# Allegro board 141939-HS-LED-CTRL-REV_A_PCB.brd
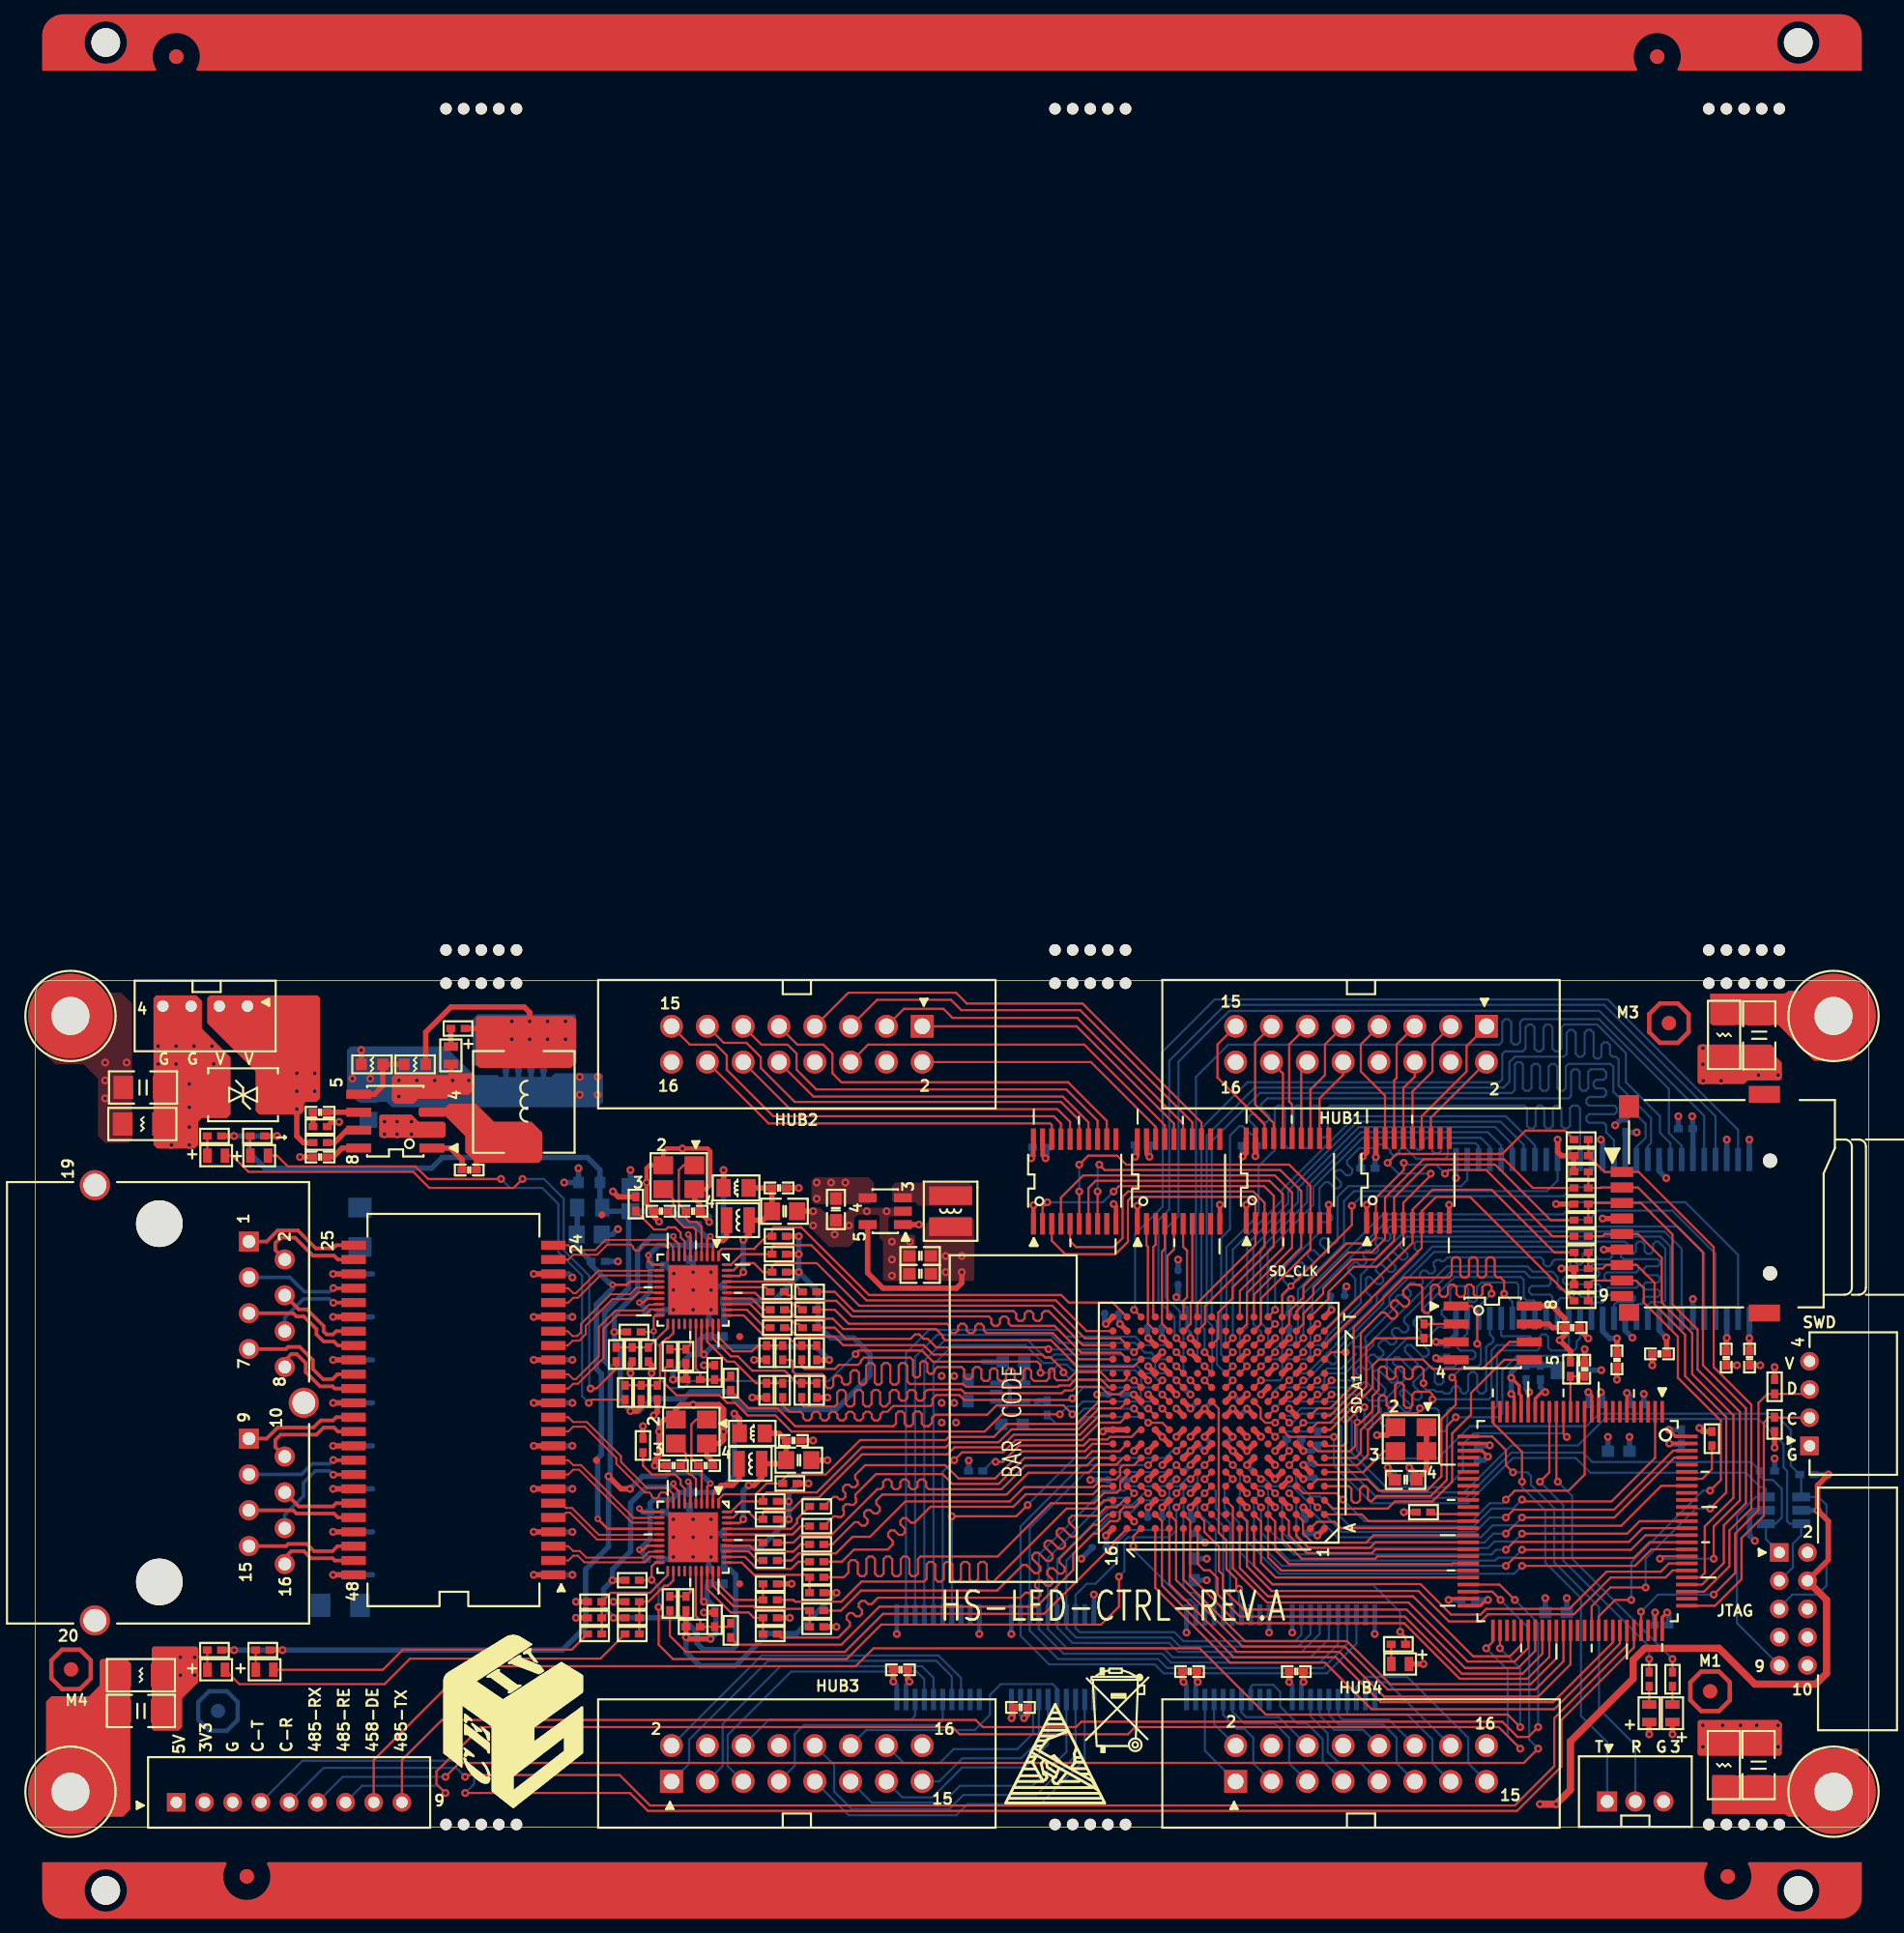
[diagram p0: board, top side]
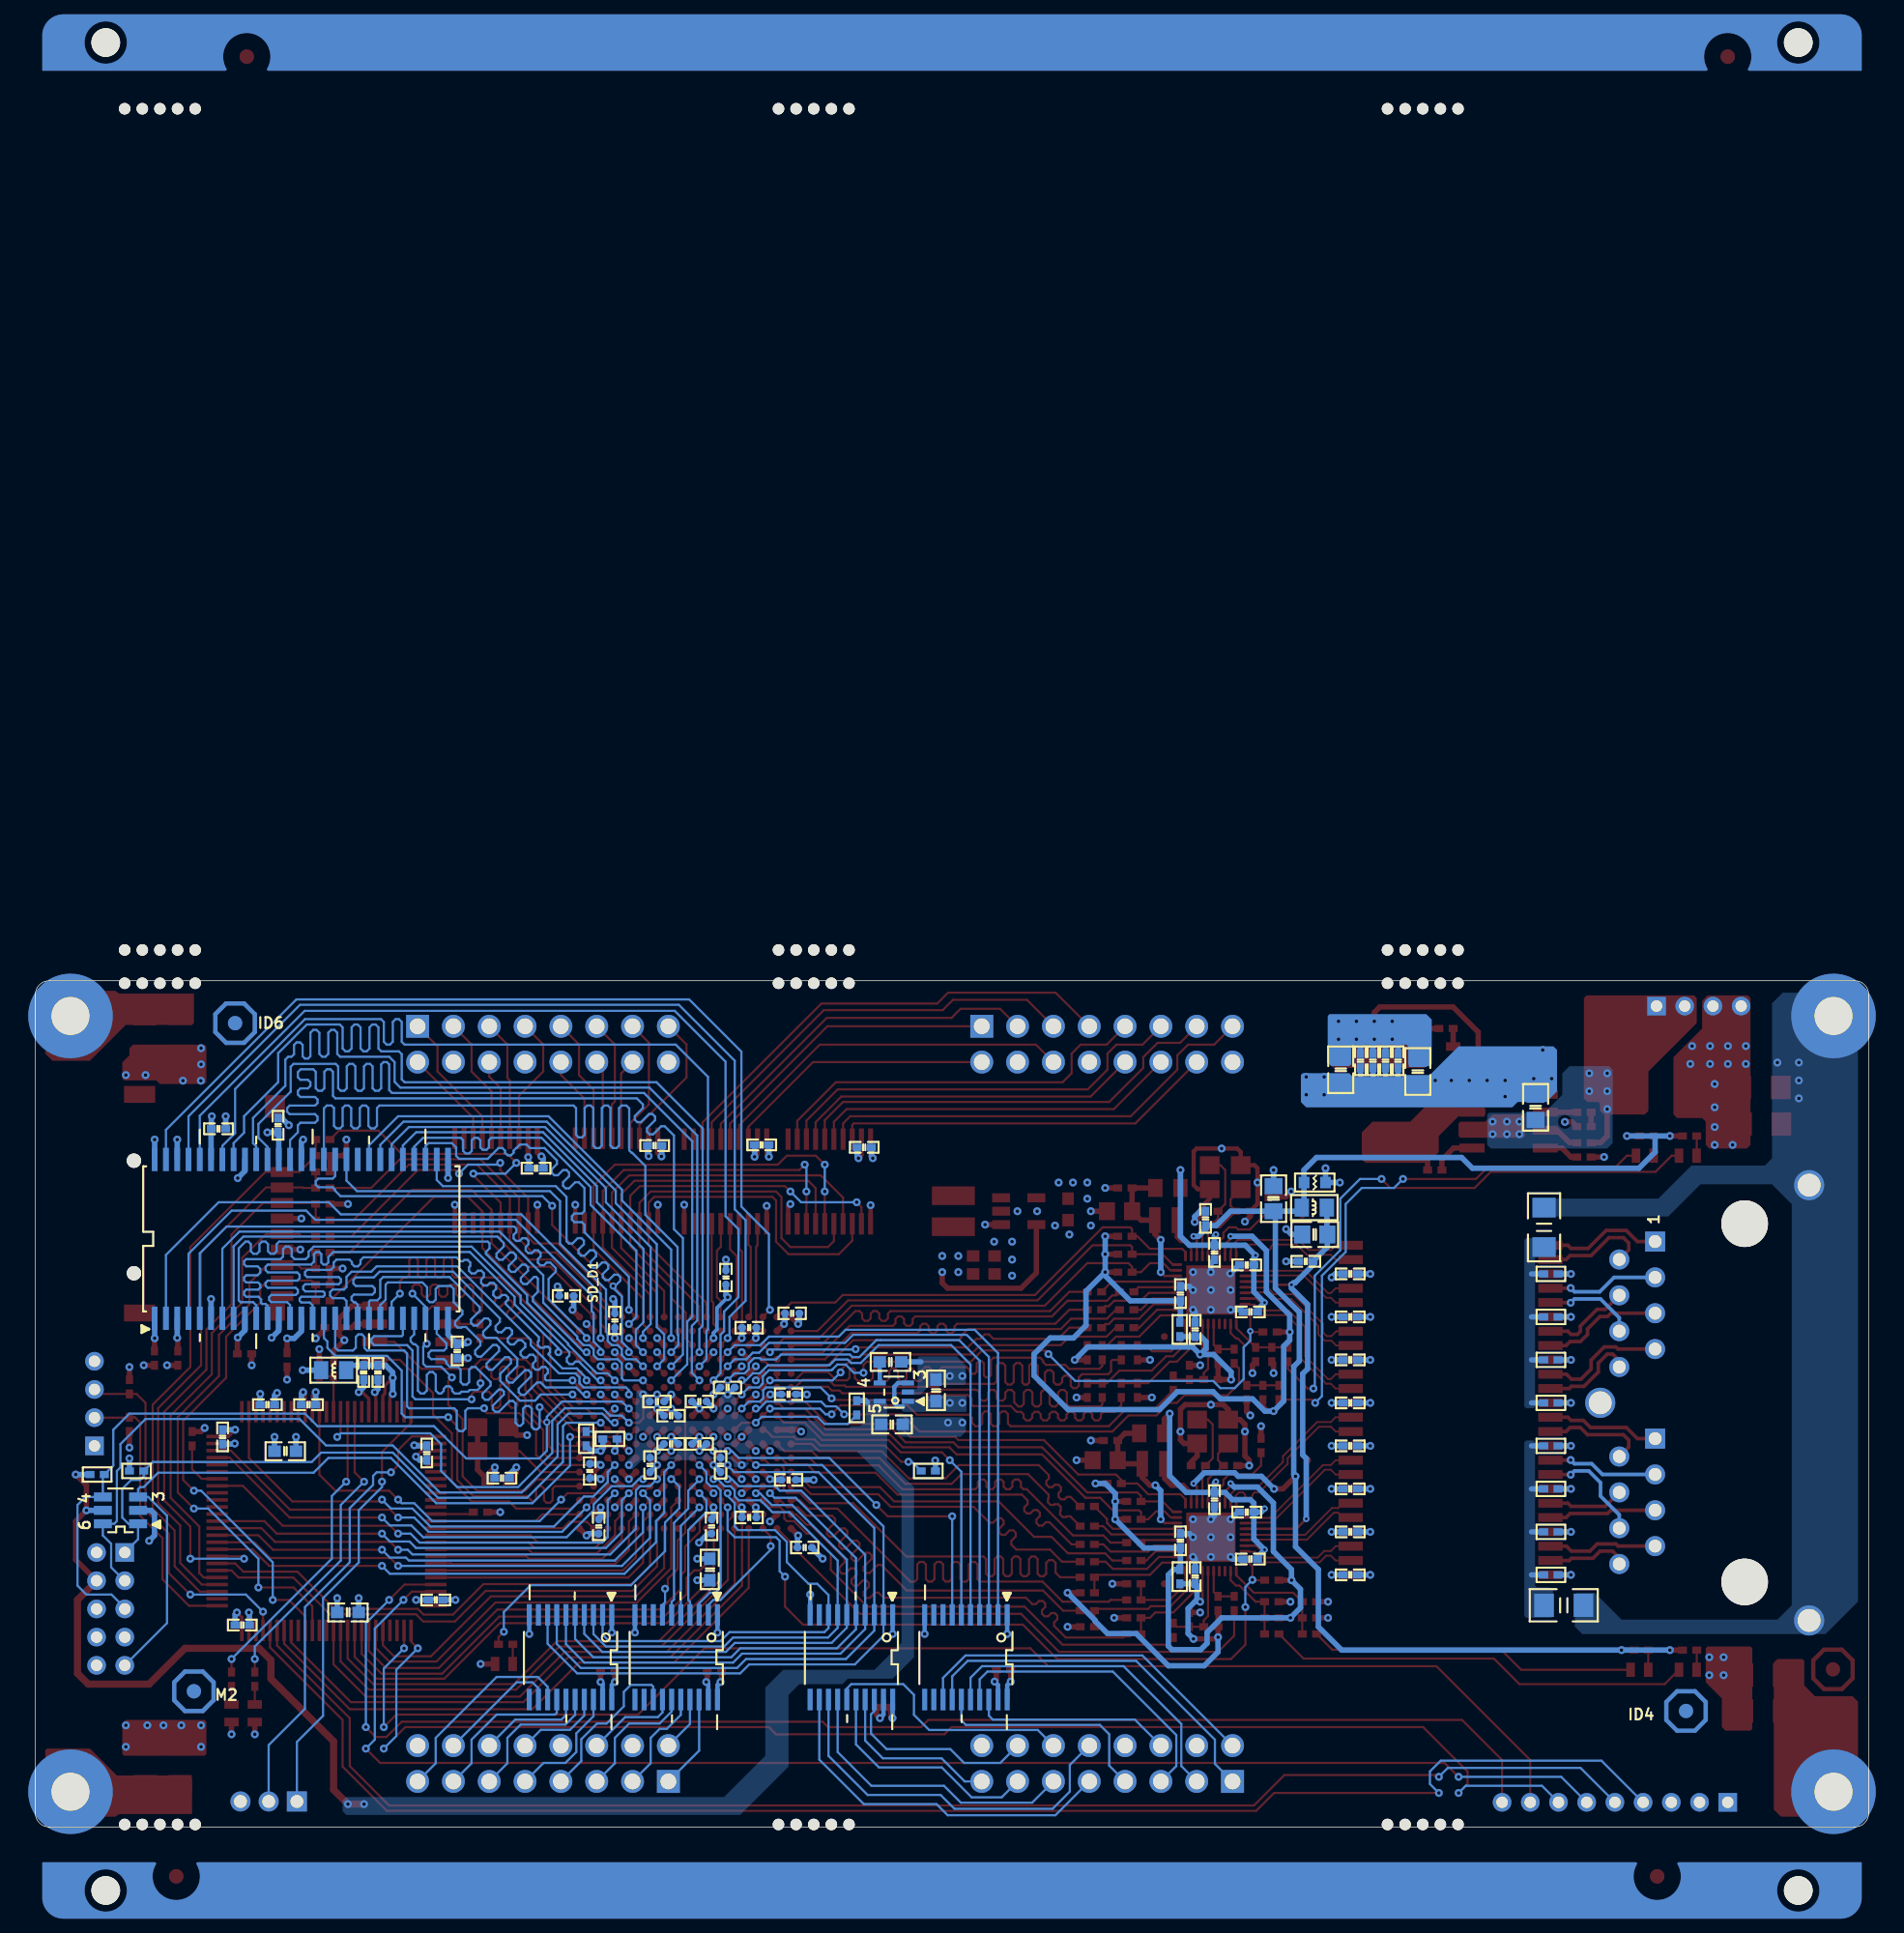
[diagram p1: board, bottom side, seen from below]

Outline 130 x 60 mm; copper layers: TOP, ART02, ART03, BOTTOM. Coordinates in mm from the lower left corner of the outline.
Outline path: 0,59 arc(0.29,59.71) 1,60 129,60 arc(129.71,59.71) 130,59 130,1 arc(129.71,0.29) 129,0 1,0 arc(0.29,0.29) 0,1 0,59

## Design rules (mm)
net group DIFFPAIR0: nets ENETA_MDI_N0 ENETA_MDI_P0
net group DIFFPAIR1: nets ENETA_MDI_N1 ENETA_MDI_P1
net group DIFFPAIR2: nets ENETA_MDI_N2 ENETA_MDI_P2
net group DIFFPAIR3: nets ENETA_MDI_N3 ENETA_MDI_P3
net group DIFFPAIR4: nets ENETB_MDI_N0 ENETB_MDI_P0
net group DIFFPAIR5: nets ENETB_MDI_N1 ENETB_MDI_P1
net group DIFFPAIR6: nets ENETB_MDI_N2 ENETB_MDI_P2
net group DIFFPAIR7: nets ENETB_MDI_N3 ENETB_MDI_P3
net group ENETA_GTX_CLK: nets ENETA_GTX_CLK MIIA_GTX_CLK
net group ENETA_RX_D0: nets ENETA_RX_D0 MIIA_RX_D0
net group ENETA_RX_D1: nets ENETA_RX_D1 MIIA_RX_D1
net group ENETA_RX_DV: nets ENETA_RX_DV MIIA_RX_DV
net group ENETA_TX_D0: nets ENETA_TX_D0 MIIA_TX_D0
net group ENETA_TX_D1: nets ENETA_TX_D1 MIIA_TX_D1
net group ENETA_TX_D2: nets ENETA_TX_D2 MIIA_TX_D2
net group ENETA_TX_D3: nets ENETA_TX_D3 MIIA_TX_D3
net group ENETA_TX_EN: nets ENETA_TX_EN MIIA_TX_EN
net group ENETB_GTX_CLK: nets ENETB_GTX_CLK MIIB_GTX_CLK
net group ENETB_RX_D0: nets ENETB_RX_D0 MIIB_RX_D0
net group ENETB_RX_D1: nets ENETB_RX_D1 MIIB_RX_D1
net group ENETB_RX_DV: nets ENETB_RX_DV MIIB_RX_DV
net group ENETB_TX_D0: nets ENETB_TX_D0 MIIB_TX_D0
net group ENETB_TX_D1: nets ENETB_TX_D1 MIIB_TX_D1
net group ENETB_TX_D2: nets ENETB_TX_D2 MIIB_TX_D2
net group ENETB_TX_D3: nets ENETB_TX_D3 MIIB_TX_D3
net group ENETB_TX_EN: nets ENETB_TX_EN MIIB_TX_EN
net group ENETA_RX_CLK: nets ENETA_RX_CLK ENETA_RX_D2 ENETA_RX_D3 MIIA_RX_CLK MIIA_RX_D2 MIIA_RX_D3 VDDIO_A_RGMII
net group ENETB_RX_CLK: nets ENETB_RX_CLK ENETB_RX_D2 ENETB_RX_D3 MIIB_RX_CLK MIIB_RX_D2 MIIB_RX_D3 VDDIO_B_RGMII
net group POWER: nets ENET_AVDD_3.3 ENET_DVDD_3.3 ENETA_AVDD_1.1 ENETA_DVDD_1.1 ENETA_DVDD_2.5 ENETB_AVDD_1.1 ENETB_DVDD_1.1 ENETB_DVDD_2.5

## Placement (name value [footprint] x y rotation side)
C1  10u  [C0805]  23.63 51.02 90 bottom
C2  0.1u  [C0402]  20.2 47.5 180 top
C3  33n  [C0402]  20.2 50.68 180 top
C4  0.01u  [C0402]  30.77 46.58 180 top
C5  10u  [C0805]  37.44 53.69 270 bottom
C6  10u  [C0805]  31.98 53.56 270 bottom
C7  0.1u  [C0402]  35.15 54.33 270 bottom
C8  0.1u  [C0402]  36.04 54.33 270 bottom
C9  0.1u  [C0402]  34.26 54.33 270 bottom
C10  0.1u  [C0402]  33.37 54.33 270 bottom
C11  10uF  [C0402]  109.86 32.46 270 top
C28  104  [C0402]  108.97 35.4 180 top
C29  104  [C0402]  112.15 33.12 270 top
C30  104  [C0402]  115.16 33.54 180 top
C31  104  [C0402]  100.08 33.75 270 bottom
C32  104  [C0402]  119.89 33.24 270 top
C33  104  [C0402]  112.78 49.75 90 bottom
C34  104  [C0402]  121.54 33.24 270 top
C35  104  [C0402]  117 49.5 180 bottom
C36  22u/6.3V  [C0603]  112.27 26.64 0 bottom
C37  22u/6.3V  [C0603]  107.83 15.21 0 bottom
C38  22u/6.3V  [C0603]  82.17 18.26 90 bottom
C39  27pF  [C0402]  46.65 43.66 180 top
C40  27pF  [C0402]  47.53 25.62 180 top
C41  27pF  [C0402]  44.36 43.66 0 top
C42  27pF  [C0402]  45.25 25.62 0 top
C43  1uF  [C0402]  48.8 37.82 90 bottom
C44  0.1uF  [C0402]  47.76 35.28 90 bottom
C45  1uF  [C0402]  48.8 20.29 90 bottom
C46  0.1uF  [C0402]  47.76 17.75 90 bottom
C47  0.1uF  [C0402]  46.39 40.74 270 bottom
C48  0.1uF  [C0402]  44.11 39.85 0 bottom
C49  10uF  [C0805]  53.12 43.66 0 top
C50  0.1uF  [C0402]  52.74 45.31 0 top
C51  0.1uF  [C0402]  43.85 36.52 0 bottom
C52  10uF  [C0805]  54.14 26 0 top
C53  0.1uF  [C0402]  53.76 27.4 0 top
C54  0.1uF  [C0402]  46.39 23.21 270 bottom
C55  0.1uF  [C0402]  43.85 18.99 0 bottom
C56  0.1uF  [C0402]  44.11 22.32 0 bottom
C57  0.1uF  [C0402]  47.03 43.15 90 bottom
C58  10uF  [C0805]  42.2 44.55 90 bottom
C59  0.1uF  [C0402]  39.91 40.1 0 bottom
C60  1uF  [C0805]  39.28 42.01 0 bottom
C226  0.1uF  [C0402]  36.76 17.88 180 bottom
C227  0.1uF  [C0402]  36.76 20.92 180 bottom
C228  0.1uF  [C0402]  36.76 23.97 180 bottom
C229  0.1uF  [C0402]  36.76 27.02 180 bottom
C230  0.1uF  [C0402]  36.76 30.07 180 bottom
C231  0.1uF  [C0402]  36.76 33.12 180 bottom
C232  0.1uF  [C0402]  36.76 36.16 180 bottom
C233  0.1uF  [C0402]  36.76 39.21 180 bottom
C236  1000pF/2KV  [C1206]  23.02 42.51 270 bottom
C238  22u/6.3V  [C0603]  56.77 43.78 270 top
C239  22u/6.3V  [C0603]  62.74 40.48 180 top
C240  22u/6.3V  [C0603]  62.74 39.21 180 top
C241  22u/6.3V  [C0603]  66.14 30.96 90 bottom
C242  22u/6.3V  [C0603]  69.36 32.97 180 bottom
C243  22u/6.3V  [C0603]  69.25 28.54 180 bottom
C244  0.1uF  [C0402]  101.6 16.1 0 bottom
C245  0.1uF  [C0402]  116.72 27.66 90 bottom
C246  0.1uF  [C0402]  110.62 29.94 180 bottom
C247  0.1uF  [C0402]  115.32 14.32 0 bottom
C248  0.1uF  [C0402]  102.24 26.51 270 bottom
C251  1uF  [C0402]  106.72 32.23 90 bottom
C252  10nF  [C0402]  105.7 32.23 90 bottom
C253  4.7uF  [C0402]  113.54 29.94 180 bottom
C254  104  [SC0402]  75.44 19.81 180 bottom
C255  104  [SC0402]  92.33 37.66 0 bottom
C256  104  [SC0402]  85.92 30.16 180 bottom
C257  104  [SC0402]  86.41 25.67 270 bottom
C258  104  [SC0402]  82.92 27.16 0 bottom
C259  104  [SC0402]  82.92 30.16 0 bottom
C260  104  [SC0402]  84.92 27.16 180 bottom
C261  104  [SC0402]  84.92 29.16 180 bottom
C262  104  [SC0402]  76.33 36.42 0 bottom
C263  104  [SC0402]  88.9 35.91 90 bottom
C264  104  [SC0402]  79.38 21.94 0 bottom
C265  104  [SC0402]  82.05 21.31 270 bottom
C266  104  [SC0402]  81.03 38.96 90 bottom
C267  104  [SC0402]  90.68 25.24 90 bottom
C268  104  [SC0402]  90.05 21.31 90 bottom
C269  104  [SC0402]  76.59 24.61 180 bottom
C270  104  [SC0402]  76.59 30.68 180 bottom
C271  104  [SC0402]  79.38 35.4 0 bottom
C274  2.2uF  [C0603]  97.16 24.61 180 top
C275  0.1uF  [C0402]  96.91 24.73 180 bottom
C276  104  [SC0402]  81.41 25.67 270 bottom
C277  104  [SC0402]  80.92 31.16 0 bottom
C278  NC  [C1206]  7.65 52.43 0 top
C279  NC  [C1206]  7.5 8.22 0 top
C280  NC  [C1206]  122.19 4.39 90 top
C281  NC  [C1206]  122.23 56.13 270 top
C282  0.1u  [C0402]  94.49 46.71 0 bottom
C283  0.1u  [C0402]  86.08 48.31 0 bottom
C284  0.1u  [C0402]  78.49 48.36 0 bottom
C285  0.1u  [C0402]  71.22 48.19 0 bottom
C286  0.1u  [C0402]  61.35 11.15 0 top
C287  0.1u  [C0402]  69.85 8.48 0 top
C288  0.1u  [C0402]  81.84 11.02 0 top
C289  0.1u  [C0402]  89.41 11.02 0 top
C292  1000pF/2KV  [C1206]  21.63 15.72 0 bottom
D1  LED_R  [D0603]  114.43 8.06 90 top
D2  LED_R  [D0603]  116.08 8.06 90 top
D4  SMBJ-5.0CA  [DO-214AA]  14.74 51.91 0 top
D26  LED_R  [D0603]  29.47 54.71 270 top
D34  LED_Y  [D0603]  16.26 11.15 0 top
D35  LED_G  [D0603]  12.83 11.15 0 top
D36  LED_Y  [D0603]  12.83 47.59 0 top
D37  LED_G  [D0603]  15.88 47.59 0 top
D38  LED_B  [D0603]  96.77 11.56 180 top
FB1  600mAFB10ohm  [L0805]  49.69 45.31 180 top
FB2  600mAFB10ohm  [L0805]  50.84 27.91 180 top
FB3  600mAFB10ohm  [L0805]  39.31 43.91 180 bottom
H1  HOLE  [PAD_D3_5]  2.5 57.5 0 top
H2  HOLE  [PAD_D3_5]  2.5 2.5 0 top
H3  HOLE  [PAD_D3_5]  127.5 2.5 0 top
H4  HOLE  [PAD_D3_5]  127.5 57.5 0 top
J1  JTAG-10  [JTAG-10-2_0]  124.65 15.46 270 top
J2  RJ45-1*2  [RJ8-0102SRFZ]  8.8 30.08 270 top
J3  Header 1x4  [PH-4AW-2_0]  125.8 30.02 90 top
J4  TF_Card  [SD-MICRO]  123 44.19 90 top
J6  CAN&RS485  [PH-9A-2_0]  18 2.45 0 top
J7  CON3  [PH-3A-2_0]  113.45 2.51 0 top
J8  HUB75  [HD2X8-2_54-W]  94 55.5 0 top
J11  HUB75  [HD2X8-2_54-W]  54 55.5 0 top
J12  HUB75  [HD2X8-2_54-W]  94 4.5 180 top
J13  HUB75  [HD2X8-2_54-W]  54 4.5 180 top
J15  DC-5V  [PH-4A-2_0]  12.05 57.5 180 top
L1  10uH  [L7X7]  34.64 51.4 90 top
L6  MIPF2016D4R7  [L2016]  49.82 43.02 180 top
L7  MIPF2016D4R7  [L2016]  50.71 25.75 180 top
L8  4.7uH  [NR3015]  64.9 43.66 270 top
L10  100uH  [L0805]  108.84 32.39 0 bottom
M1  MARK  [TPAD]  118.75 9.62 0 top
M2  MARK  [TPAD]  118.75 9.62 180 bottom
M3  MARK  [TPAD]  115.83 56.99 0 top
M4  MARK  [TPAD]  2.54 11.18 0 top
NOREF  -  []  318.77 148.59 0 top
NOREF#2  -  []  319.66 104.36 0 top
NOREF#3  -  []  -118.75 -80.01 0 top
NOREF#4  -  [unnamed#2]  0 124.01 180 top
NOREF#5  -  [unnamed#3]  130 124.01 0 top
NOREF#6  -  []  1 62 0 top
NOREF#7  -  [unnamed#4]  31.62 61 0 top
NOREF#8  -  []  71.63 4.7 0 top
NOREF#9  -  []  79.25 8.38 0 top
NOREF#10  -  []  0 0 0 top
NOREF#11  -  [unnamed#4]  121.16 61 0 top
NOREF#12  -  [unnamed#5]  130 -2 180 top
NOREF#13  -  [unnamed#4]  74.8 61 0 top
NOREF#14  -  [unnamed#6]  121.16 123 180 top
NOREF#15  -  []  0 124.01 0 top
NOREF#16  -  []  1 60 0 top
NOREF#17  -  [unnamed#3]  0 -2 180 top
NOREF#18  -  []  327.02 196.85 0 top
NOREF#19  -  []  0 0 0 top
NOREF#20  -  []  2.5 2.5 0 top
NOREF#21  -  []  69.34 34.04 90 top
NOREF#22  -  [unnamed#6]  31.62 -1 0 top
NOREF#23  -  [unnamed#6]  31.62 123 180 top
NOREF#24  -  []  0 0 0 top
NOREF#25  -  []  0 -2 0 top
NOREF#26  -  []  0 0 0 top
NOREF#27  -  []  2 129.01 0 top
NOREF#28  -  []  1 122 0 top
NOREF#29  -  [unnamed#6]  74.8 -1 0 top
NOREF#30  -  []  2.5 2.5 0 top
NOREF#31  -  [unnamed#6]  121.16 -1 0 top
NOREF#32  -  []  351.15 39.37 0 top
NOREF#33  -  []  130 1 0 top
NOREF#34  -  [unnamed#6]  74.8 123 180 top
NOREF#35  -  [unnamed#7]  12.96 8.22 180 bottom
NOREF#36  -  [unnamed#7]  115.83 56.99 180 bottom
P1  EP4CE15F256  [FBGA-256]  83.91 28.66 90 top
R1  47k  [R0402]  20.2 48.52 180 top
R2  2.2k  [R0402]  20.2 49.66 0 top
R3  10k/1%  [R0603]  23.88 54.07 0 top
R4  26k/%1  [R0603]  26.93 54.07 180 top
R5  10K  [R0402]  108.84 32.46 270 top
R11  1k  [R0402]  122.81 25.24 180 bottom
R12  10k  [R0402]  125.61 24.99 0 bottom
R13  22R  [R0402]  98.47 35.16 90 top
R16  1k  [R0402]  89.25 27.51 0 bottom
R17  1k  [R0402]  90.94 27.53 270 bottom
R18  1k  [R0402]  66.68 25.24 180 bottom
R22  22R  [R0402]  55.41 17.71 180 top
R23  1.5K  [R0402]  52.11 21.81 180 top
R24  22R  [R0402]  53 33.62 90 top
R25  22R  [R0402]  52.11 16.1 180 top
R26  4.7K  [R0402]  52.11 23.08 180 top
R27  22R  [R0402]  54.35 30.96 90 top
R28  22R  [R0402]  55.41 15.34 180 top
R29  10K  [R0402]  42.33 17.5 0 top
R30  22R  [R0402]  53 30.96 90 top
R31  2.37K  [R0402]  42.58 44.17 90 top
R32  22R  [R0402]  52.11 13.69 180 top
R33  2.37K  [R0402]  43.09 27.05 90 top
R34  4.7K  [R0402]  53.5 24.35 180 top
R35  22R  [R0402]  49.31 31.47 90 top
R36  22R  [R0402]  49.31 13.94 90 top
R37  22R  [R0402]  44.99 33.37 90 top
R38  22R  [R0402]  44.99 15.84 90 top
R39  22R  [R0402]  54.9 35.4 180 top
R40  22R  [R0402]  52.11 18.89 180 top
R41  22R  [R0402]  52.61 35.4 180 top
R42  22R  [R0402]  55.41 18.81 180 top
R43  22R  [R0402]  52.61 36.67 180 top
R44  22R  [R0402]  55.41 20.04 180 top
R45  22R  [R0402]  54.9 36.67 180 top
R46  22R  [R0402]  52.11 20.16 180 top
R47  22R  [R0402]  52.61 37.94 180 top
R48  22R  [R0402]  55.41 21.33 180 top
R49  22R  [R0402]  54.9 37.94 180 top
R50  22R  [R0402]  55.41 22.73 180 top
R51  1K  [R0402]  41.18 33.5 270 top
R52  1K  [R0402]  39.66 13.69 180 top
R56  1K  [R0402]  41.82 30.81 270 top
R60  1K  [R0402]  42.33 13.69 180 top
R73  10k  [R0402]  43.47 33.5 90 top
R76  10k  [R0402]  44.11 30.81 90 top
R77  10k  [R0402]  39.66 15.97 0 top
R89  10k  [R0402]  42.33 15.97 0 top
R90  10K  [R0402]  42.33 33.5 90 top
R91  10K  [R0402]  55.41 33.62 90 top
R92  10K  [R0402]  39.66 14.83 0 top
R93  10K  [R0402]  55.41 16.61 180 top
R94  0R  [R0603]  39.28 45.69 0 bottom
R95  10K  [R0402]  55.41 30.96 90 top
R96  10K  [R0402]  46.14 33.37 90 top
R97  10K  [R0402]  55.41 14.19 180 top
R98  10K  [R0402]  46.14 15.84 90 top
R99  10K  [R0402]  51.85 30.96 90 top
R100  10K  [R0402]  42.96 30.81 90 top
R101  10K  [R0402]  52.11 14.83 180 top
R102  10K  [R0402]  42.33 14.83 0 top
R103  DNI  [R0402]  46.65 31.72 0 top
R104  DNI  [R0402]  46.65 14.19 0 top
R105  10K  [R0402]  48.17 32.23 270 top
R106  10K  [R0402]  48.17 14.7 270 top
R107  10K  [R0402]  51.85 33.62 90 top
R108  10K  [R0402]  52.11 17.24 180 top
R111  75R  [R0402]  22.54 17.88 0 bottom
R112  75R  [R0402]  22.54 20.92 0 bottom
R113  75R  [R0402]  22.54 23.97 0 bottom
R114  75R  [R0402]  22.54 27.02 0 bottom
R115  75R  [R0402]  22.54 30.07 0 bottom
R116  75R  [R0402]  22.54 33.12 0 bottom
R117  75R  [R0402]  22.54 36.16 0 bottom
R118  75R  [R0402]  22.54 39.21 0 bottom
R120  0  [R0402]  48.85 35.28 90 bottom
R121  22R  [R0402]  54.35 33.62 90 top
R122  0  [R0402]  48.85 17.75 90 bottom
R123  1.5K  [R0402]  52.74 39.34 180 top
R124  4.7K  [R0402]  52.74 40.61 180 top
R125  10K  [R0402]  42.45 35.1 0 top
R126  4.7K  [R0402]  52.74 41.88 180 top
R127  4.7K  [R0402]  116.08 10.48 90 top
R128  4.7K  [R0402]  114.43 10.48 90 top
R129  10K  [R0402]  123.32 28.54 90 top
R130  10K  [R0402]  123.32 31.21 90 top
R131  10K  [R0402]  118.88 27.53 270 top
R135  10K  [R0402]  98.43 22.32 0 top
R137  10K  [R0402]  109.61 38.45 0 top
R138  10K  [R0402]  109.61 39.59 0 top
R139  10K  [R0402]  109.61 44.17 0 top
R140  10K  [R0402]  109.61 46.45 0 top
R141  10K  [R0402]  109.61 47.59 0 top
R142  2.2K  [R0402]  29.98 56.61 0 top
R146  1k  [R0402]  15.75 48.99 180 top
R147  1k  [R0402]  12.7 48.99 180 top
R148  1k  [R0402]  12.7 12.54 180 top
R149  1k  [R0402]  16.13 12.54 180 top
R154  NC  [R1206]  7.59 49.84 0 top
R155  NC  [R1206]  7.5 10.76 0 top
R156  NC  [R1206]  119.72 4.39 90 top
R157  NC  [R1206]  119.74 56.16 270 top
R158  0  [R0402]  109.61 40.74 0 top
R159  0  [R0402]  109.61 37.31 0 top
R160  0  [R0402]  109.61 48.74 0 top
R161  0  [R0402]  109.61 45.31 0 top
R162  0  [R0402]  109.61 43.02 0 top
R163  0  [R0402]  109.61 41.88 0 top
R164  0  [R0402]  71.75 29.72 90 bottom
R165  1k  [R0402]  96.65 12.95 180 top
U1  MP1482DS  [SOIC8]  25.53 50.04 90 top
U5  HY57V641620HT-H  [TSOP-II-54]  111.13 41.7 180 bottom
U6  SRV05-4  [SOT23-6]  123.96 22.45 90 bottom
U7  EPCS16  [SO8]  103.34 35.03 270 top
U8  AR8035  [QFN40]  46.65 38.07 180 top
U9  AR8035  [QFN40#2]  46.65 20.54 180 top
U23  H5014NL  [TFM48-40-480]  29.65 29.56 90 top
U24  RT8008-12GJ5  [TSOT-23-5]  60.27 43.66 90 top
U25  RT9193-25GU5  [SC-70-5]  69.13 30.83 90 bottom
U26  STM32F103VET6  [QFP100-20-1414]  109.35 21.69 180 top
U27  TC74VHC245  [TSSOP-20]  97.32 45.83 0 top
U28  TC74VHC245  [TSSOP-20]  88.78 45.83 0 top
U29  TC74VHC245  [TSSOP-20]  73.7 45.77 0 top
U30  TC74VHC245  [TSSOP-20]  81.06 45.77 0 top
U31  TC74VHC245  [TSSOP-20]  72.13 12.03 0 bottom
U32  TC74VHC245  [TSSOP-20]  64.01 12.03 0 bottom
U33  TC74VHC245  [TSSOP-20]  92.05 12.03 0 bottom
U34  TC74VHC245  [TSSOP-20]  84.55 12.03 0 bottom
X4  OXJTDLJANF-25M  [3_2X2_5_4P]  97.54 27.5 180 top
Y1  XXCBPLNANF-25M  [3_2X2_5_4P]  45.63 46.07 180 top
Y2  XXCBPLNANF-25M  [3_2X2_5_4P]  46.52 28.04 180 top

## Library data of the parts
C1 C5 C6 = C0805
C2 C7-C10 C282-C289 = C0402
C3 C4 C11 C28-C35 C39-C48 C50 C51 C53-C57 C59 C226-C233 C244-C248 C251-C253 C275 = C0402: tolerance: 0.1u
C36-C38 C238-C243 = C0603
C49 C52 C58 C60 = C0805: tolerance: 10u
C236 C292 = C1206
C254-C271 C276 C277 = SC0402
C274 = C0603: tolerance: 22u/6.3V
C278-C281 = C1206: tolerance: 1000pF/2KV
D1 D2 D26 = D0603
D4 = DO-214AA
D34-D38 = D0603: tolerance: LED_R
FB1-FB3 = L0805
H1-H4 = PAD_D3_5
J1 = JTAG-10-2_0
J2 = RJ8-0102SRFZ
J3 = PH-4AW-2_0
J4 = SD-MICRO
J6 = PH-9A-2_0
J7 = PH-3A-2_0
J8 J11-J13 = HD2X8-2_54-W
J15 = PH-4A-2_0
L1 = L7X7
L6 L7 = L2016
L8 = NR3015
L10 = L0805: tolerance: 600mAFB10ohm
M1-M4 = TPAD
P1 = FBGA-256
R1 R2 R11 R13 R16-R18 R23 R26 R31 R33 R34 R51 R52 R56 R60 R111-R118 R120 R122-R124 R126-R128 R142 R146-R149 R158-R165 = R0402: tolerance: 10k
R3 = R0603
R4 R94 = R0603: tolerance: 10k/1%
R5 R29 R90-R93 R95-R102 R105-R108 R125 R129-R131 R135 R137-R141 = R0402: tolerance: 10k; signal model: R0402_10K
R12 R73 R76 R77 R89 = R0402
R22 R24 R25 R27 R28 R30 R32 R35-R50 R121 = R0402: tolerance: 10k; signal model: R0402_22R
R103 R104 = R0402: tolerance: 10k; signal model: R0402_DNI
R154-R157 = R1206: tolerance: 0
U1 = SOIC8
U5 = TSOP-II-54
U6 = SOT23-6
U7 = SO8
U8 U9 = QFN40
U23 = TFM48-40-480
U24 = TSOT-23-5: tolerance: RT8008X_5P
U25 = SC-70-5: tolerance: RT9193
U26 = QFP100-20-1414: tolerance: STM32F103VE
U27-U34 = TSSOP-20: tolerance: 74VHC245
X4 = 3_2X2_5_4P
Y1 Y2 = 3_2X2_5_4P: tolerance: OXJTDLJANF-25M

## Footprints (pads in the part's own frame, mm; a bottom-side part is the same pattern mirrored in y, then rotated)
3_2X2_5_4P
  rect 1.397x1.27 smd: 1(-1.1,-0.85) 2(1.1,-0.85) 3(1.1,0.85) 4(-1.1,0.85)
C0402
  rect 0.635x0.508 smd: 1(-0.508,0) 2(0.508,0)
C0603
  rect 0.889x0.813 smd: 1(-0.762,0) 2(0.762,0)
C0805
  rect 1.143x1.27 smd: 1(-0.889,0) 2(0.889,0)
C1206
  rect 1.397x1.651 smd: 1(-1.397,0) 2(1.397,0)
D0603
  rect 0.61x1.016 smd: 1(-0.625,0) 2(0.625,0)
DO-214AA
  rect 1.626x2.337 smd: 1(-2.2,0) 2(2.2,0)
FBGA-256
  round 0.508 smd: A1(-7.5,-7.5) A2(-7.5,-6.5) A3(-7.5,-5.5) A4(-7.5,-4.5) A5(-7.5,-3.5) A6(-7.5,-2.5) A7(-7.5,-1.5) A8(-7.5,-0.5) A9(-7.5,0.5) A10(-7.5,1.5) A11(-7.5,2.5) A12(-7.5,3.5) A13(-7.5,4.5) A14(-7.5,5.5) A15(-7.5,6.5) A16(-7.5,7.5) B1(-6.5,-7.5) B2(-6.5,-6.5) B3(-6.5,-5.5) B4(-6.5,-4.5) B5(-6.5,-3.5) B6(-6.5,-2.5) B7(-6.5,-1.5) B8(-6.5,-0.5) B9(-6.5,0.5) B10(-6.5,1.5) B11(-6.5,2.5) B12(-6.5,3.5) B13(-6.5,4.5) B14(-6.5,5.5) B15(-6.5,6.5) B16(-6.5,7.5) C1(-5.5,-7.5) C2(-5.5,-6.5) C3(-5.5,-5.5) C4(-5.5,-4.5) C5(-5.5,-3.5) C6(-5.5,-2.5) C7(-5.5,-1.5) C8(-5.5,-0.5) C9(-5.5,0.5) C10(-5.5,1.5) C11(-5.5,2.5) C12(-5.5,3.5) C13(-5.5,4.5) C14(-5.5,5.5) C15(-5.5,6.5) C16(-5.5,7.5) D1(-4.5,-7.5) D2(-4.5,-6.5) D3(-4.5,-5.5) D4(-4.5,-4.5) D5(-4.5,-3.5) D6(-4.5,-2.5) D7(-4.5,-1.5) D8(-4.5,-0.5) D9(-4.5,0.5) D10(-4.5,1.5) D11(-4.5,2.5) D12(-4.5,3.5) D13(-4.5,4.5) D14(-4.5,5.5) D15(-4.5,6.5) D16(-4.5,7.5) E1(-3.5,-7.5) E2(-3.5,-6.5) E3(-3.5,-5.5) E4(-3.5,-4.5) E5(-3.5,-3.5) E6(-3.5,-2.5) E7(-3.5,-1.5) E8(-3.5,-0.5) E9(-3.5,0.5) E10(-3.5,1.5) E11(-3.5,2.5) E12(-3.5,3.5) E13(-3.5,4.5) E14(-3.5,5.5) E15(-3.5,6.5) E16(-3.5,7.5) F1(-2.5,-7.5) F2(-2.5,-6.5) F3(-2.5,-5.5) F4(-2.5,-4.5) F5(-2.5,-3.5) F6(-2.5,-2.5) F7(-2.5,-1.5) F8(-2.5,-0.5) F9(-2.5,0.5) F10(-2.5,1.5) F11(-2.5,2.5) F12(-2.5,3.5) F13(-2.5,4.5) F14(-2.5,5.5) F15(-2.5,6.5) F16(-2.5,7.5) G1(-1.5,-7.5) G2(-1.5,-6.5) G3(-1.5,-5.5) G4(-1.5,-4.5) G5(-1.5,-3.5) G6(-1.5,-2.5) G7(-1.5,-1.5) G8(-1.5,-0.5) G9(-1.5,0.5) G10(-1.5,1.5) G11(-1.5,2.5) G12(-1.5,3.5) G13(-1.5,4.5) G14(-1.5,5.5) G15(-1.5,6.5) G16(-1.5,7.5) H1(-0.5,-7.5) H2(-0.5,-6.5) H3(-0.5,-5.5) H4(-0.5,-4.5) H5(-0.5,-3.5) H6(-0.5,-2.5) H7(-0.5,-1.5) H8(-0.5,-0.5) H9(-0.5,0.5) H10(-0.5,1.5) H11(-0.5,2.5) H12(-0.5,3.5) H13(-0.5,4.5) H14(-0.5,5.5) H15(-0.5,6.5) H16(-0.5,7.5) J1(0.5,-7.5) J2(0.5,-6.5) J3(0.5,-5.5) J4(0.5,-4.5) J5(0.5,-3.5) J6(0.5,-2.5) J7(0.5,-1.5) J8(0.5,-0.5) J9(0.5,0.5) J10(0.5,1.5) J11(0.5,2.5) J12(0.5,3.5) J13(0.5,4.5) J14(0.5,5.5) J15(0.5,6.5) J16(0.5,7.5) K1(1.5,-7.5) K2(1.5,-6.5) K3(1.5,-5.5) K4(1.5,-4.5) K5(1.5,-3.5) K6(1.5,-2.5) K7(1.5,-1.5) K8(1.5,-0.5) K9(1.5,0.5) K10(1.5,1.5) K11(1.5,2.5) K12(1.5,3.5) K13(1.5,4.5) K14(1.5,5.5) K15(1.5,6.5) K16(1.5,7.5) L1(2.5,-7.5) L2(2.5,-6.5) L3(2.5,-5.5) L4(2.5,-4.5) L5(2.5,-3.5) L6(2.5,-2.5) L7(2.5,-1.5) L8(2.5,-0.5) L9(2.5,0.5) L10(2.5,1.5) L11(2.5,2.5) L12(2.5,3.5) L13(2.5,4.5) L14(2.5,5.5) L15(2.5,6.5) L16(2.5,7.5) M1(3.5,-7.5) M2(3.5,-6.5) M3(3.5,-5.5) M4(3.5,-4.5) M5(3.5,-3.5) M6(3.5,-2.5) M7(3.5,-1.5) M8(3.5,-0.5) M9(3.5,0.5) M10(3.5,1.5) M11(3.5,2.5) M12(3.5,3.5) M13(3.5,4.5) M14(3.5,5.5) M15(3.5,6.5) M16(3.5,7.5) N1(4.5,-7.5) N2(4.5,-6.5) N3(4.5,-5.5) N4(4.5,-4.5) N5(4.5,-3.5) N6(4.5,-2.5) N7(4.5,-1.5) N8(4.5,-0.5) N9(4.5,0.5) N10(4.5,1.5) N11(4.5,2.5) N12(4.5,3.5) N13(4.5,4.5) N14(4.5,5.5) N15(4.5,6.5) N16(4.5,7.5) P1(5.5,-7.5) P2(5.5,-6.5) P3(5.5,-5.5) P4(5.5,-4.5) P5(5.5,-3.5) P6(5.5,-2.5) P7(5.5,-1.5) P8(5.5,-0.5) P9(5.5,0.5) P10(5.5,1.5) P11(5.5,2.5) P12(5.5,3.5) P13(5.5,4.5) P14(5.5,5.5) P15(5.5,6.5) P16(5.5,7.5) R1(6.5,-7.5) R2(6.5,-6.5) R3(6.5,-5.5) R4(6.5,-4.5) R5(6.5,-3.5) R6(6.5,-2.5) R7(6.5,-1.5) R8(6.5,-0.5) R9(6.5,0.5) R10(6.5,1.5) R11(6.5,2.5) R12(6.5,3.5) R13(6.5,4.5) R14(6.5,5.5) R15(6.5,6.5) R16(6.5,7.5) T1(7.5,-7.5) T2(7.5,-6.5) T3(7.5,-5.5) T4(7.5,-4.5) T5(7.5,-3.5) T6(7.5,-2.5) T7(7.5,-1.5) T8(7.5,-0.5) T9(7.5,0.5) T10(7.5,1.5) T11(7.5,2.5) T12(7.5,3.5) T13(7.5,4.5) T14(7.5,5.5) T15(7.5,6.5) T16(7.5,7.5)
HD2X8-2_54-W
  rect 1.626x1.626 hole 1.118: 1(8.89,1.27)
  round 1.626 hole 1.118: 2(8.89,-1.27) 3(6.35,1.27) 4(6.35,-1.27) 5(3.81,1.27) 6(3.81,-1.27) 7(1.27,1.27) 8(1.27,-1.27) 9(-1.27,1.27) 10(-1.27,-1.27) 11(-3.81,1.27) 12(-3.81,-1.27) 13(-6.35,1.27) 14(-6.35,-1.27) 15(-8.89,1.27) 16(-8.89,-1.27)
JTAG-10-2_0
  rect 1.321x1.321 hole 0.813: 1(-4,-1)
  round 1.321 hole 0.813: 2(-4,1) 3(-2,-1) 4(-2,1) 5(0,-1) 6(0,1) 7(2,-1) 8(2,1) 9(4,-1) 10(4,1)
L7X7
  rect 1.524x2.235 smd: 1(-3.15,0) 2(3.15,0)
L0805
  rect 1.016x1.27 smd: 1(-0.889,0) 2(0.889,0)
L2016
  rect 0.813x1.829 smd: 1(-0.8,0) 2(0.8,0)
NR3015
  rect 1.321x3.048 smd: 1(-1.1,0) 2(1.1,0)
PAD_D3_5
  round 5.994 hole 2.692: 1(0,0)
PH-3A-2_0
  rect 1.422x1.422 hole 0.914: 1(-2,-0.7)
  round 1.422 hole 0.914: 2(0,-0.7) 3(2,-0.7)
PH-4A-2_0
  rect 1.321x1.321 hole 0.813: 1(-3,-0.7)
  round 1.321 hole 0.813: 2(-1,-0.7) 3(1,-0.7) 4(3,-0.7)
PH-4AW-2_0
  rect 1.321x1.321 hole 0.813: 1(-3,0)
  round 1.321 hole 0.813: 2(-1,0) 3(1,0) 4(3,0)
PH-9A-2_0
  rect 1.321x1.321 hole 0.813: 1(-8,-0.7)
  round 1.321 hole 0.813: 2(-6,-0.7) 3(-4,-0.7) 4(-2,-0.7) 5(0,-0.7) 6(2,-0.7) 7(4,-0.7) 8(6,-0.7) 9(8,-0.7)
QFN40
  round 0.5 smd: (-3.3,3.3) (6.475,-5.332)
  oval 0.203x0.762 smd: 1(-1.8,-2.405) 2(-1.4,-2.405) 3(-1,-2.405) 4(-0.6,-2.405) 5(-0.2,-2.405) 6(0.2,-2.405) 7(0.6,-2.405) 8(1,-2.405) 9(1.4,-2.405) 10(1.8,-2.405) 21(1.8,2.405) 22(1.4,2.405) 23(1,2.405) 24(0.6,2.405) 25(0.2,2.405) 26(-0.2,2.405) 27(-0.6,2.405) 28(-1,2.405) 29(-1.4,2.405) 30(-1.8,2.405)
  oval 0.762x0.203 smd: 11(2.405,-1.8) 12(2.405,-1.4) 13(2.405,-1) 14(2.405,-0.6) 15(2.405,-0.2) 16(2.405,0.2) 17(2.405,0.6) 18(2.405,1) 19(2.405,1.4) 20(2.405,1.8) 31(-2.405,1.8) 32(-2.405,1.4) 33(-2.405,1) 34(-2.405,0.6) 35(-2.405,0.2) 36(-2.405,-0.2) 37(-2.405,-0.6) 38(-2.405,-1) 39(-2.405,-1.4) 40(-2.405,-1.8)
  rect 3.505x3.505 smd: 41(0,0)
QFN40#2
  round 0.5 smd: (-3.3,3.3) (6.856,-5.459)
  oval 0.203x0.762 smd: 1(-1.8,-2.405) 2(-1.4,-2.405) 3(-1,-2.405) 4(-0.6,-2.405) 5(-0.2,-2.405) 6(0.2,-2.405) 7(0.6,-2.405) 8(1,-2.405) 9(1.4,-2.405) 10(1.8,-2.405) 21(1.8,2.405) 22(1.4,2.405) 23(1,2.405) 24(0.6,2.405) 25(0.2,2.405) 26(-0.2,2.405) 27(-0.6,2.405) 28(-1,2.405) 29(-1.4,2.405) 30(-1.8,2.405)
  oval 0.762x0.203 smd: 11(2.405,-1.8) 12(2.405,-1.4) 13(2.405,-1) 14(2.405,-0.6) 15(2.405,-0.2) 16(2.405,0.2) 17(2.405,0.6) 18(2.405,1) 19(2.405,1.4) 20(2.405,1.8) 31(-2.405,1.8) 32(-2.405,1.4) 33(-2.405,1) 34(-2.405,0.6) 35(-2.405,0.2) 36(-2.405,-0.2) 37(-2.405,-0.6) 38(-2.405,-1) 39(-2.405,-1.4) 40(-2.405,-1.8)
  rect 3.505x3.505 smd: 41(0,0)
QFP100-20-1414
  rect 0.254x1.524 smd: 1(-6,-7.75) 2(-5.5,-7.75) 3(-5,-7.75) 4(-4.5,-7.75) 5(-4,-7.75) 6(-3.5,-7.75) 7(-3,-7.75) 8(-2.5,-7.75) 9(-2,-7.75) 10(-1.5,-7.75) 11(-1,-7.75) 12(-0.5,-7.75) 13(0,-7.75) 14(0.5,-7.75) 15(1,-7.75) 16(1.5,-7.75) 17(2,-7.75) 18(2.5,-7.75) 19(3,-7.75) 20(3.5,-7.75) 21(4,-7.75) 22(4.5,-7.75) 23(5,-7.75) 24(5.5,-7.75) 25(6,-7.75) 51(6,7.75) 52(5.5,7.75) 53(5,7.75) 54(4.5,7.75) 55(4,7.75) 56(3.5,7.75) 57(3,7.75) 58(2.5,7.75) 59(2,7.75) 60(1.5,7.75) 61(1,7.75) 62(0.5,7.75) 63(0,7.75) 64(-0.5,7.75) 65(-1,7.75) 66(-1.5,7.75) 67(-2,7.75) 68(-2.5,7.75) 69(-3,7.75) 70(-3.5,7.75) 71(-4,7.75) 72(-4.5,7.75) 73(-5,7.75) 74(-5.5,7.75) 75(-6,7.75)
  rect 1.524x0.254 smd: 26(7.75,-6) 27(7.75,-5.5) 28(7.75,-5) 29(7.75,-4.5) 30(7.75,-4) 31(7.75,-3.5) 32(7.75,-3) 33(7.75,-2.5) 34(7.75,-2) 35(7.75,-1.5) 36(7.75,-1) 37(7.75,-0.5) 38(7.75,0) 39(7.75,0.5) 40(7.75,1) 41(7.75,1.5) 42(7.75,2) 43(7.75,2.5) 44(7.75,3) 45(7.75,3.5) 46(7.75,4) 47(7.75,4.5) 48(7.75,5) 49(7.75,5.5) 50(7.75,6) 76(-7.75,6) 77(-7.75,5.5) 78(-7.75,5) 79(-7.75,4.5) 80(-7.75,4) 81(-7.75,3.5) 82(-7.75,3) 83(-7.75,2.5) 84(-7.75,2) 85(-7.75,1.5) 86(-7.75,1) 87(-7.75,0.5) 88(-7.75,0) 89(-7.75,-0.5) 90(-7.75,-1) 91(-7.75,-1.5) 92(-7.75,-2) 93(-7.75,-2.5) 94(-7.75,-3) 95(-7.75,-3.5) 96(-7.75,-4) 97(-7.75,-4.5) 98(-7.75,-5) 99(-7.75,-5.5) 100(-7.75,-6)
R0402
  rect 0.635x0.508 smd: 1(-0.508,0) 2(0.508,0)
R0603
  rect 0.762x0.813 smd: 1(-0.762,0) 2(0.762,0)
R1206
  rect 1.397x1.651 smd: 1(-1.397,0) 2(1.397,0)
RJ8-0102SRFZ
  round 3.302 hole 3.302 unplated: (-12.7,0) (12.7,0)
  rect 1.422x1.422 hole 0.914: 1(-11.43,6.35) 9(2.54,6.35)
  round 1.422 hole 0.914: 2(-10.16,8.89) 3(-8.89,6.35) 4(-7.62,8.89) 5(-6.35,6.35) 6(-5.08,8.89) 7(-3.81,6.35) 8(-2.54,8.89) 10(3.81,8.89) 11(5.08,6.35) 12(6.35,8.89) 13(7.62,6.35) 14(8.89,8.89) 15(10.16,6.35) 16(11.43,8.89)
  round 2.134 hole 1.626: 19(-15.43,-4.572) 20(15.43,-4.572) 21(0,10.24)
SC0402
  custom 0.559x0.508 smd: 1(-0.508,0) 2(0.508,0)
SC-70-5
  rect 0.356x0.864 smd: 1(-0.65,-1) 2(0,-1) 3(0.65,-1) 4(0.65,1) 5(-0.65,1)
SD-MICRO
  round 1.016 hole 1.016 unplated: (-4.93,0) (3.05,0)
  rect 0.711x1.6 smd: 1(2.25,10.5) 2(1.15,10.5) 3(0.05,10.5) 4(-1.05,10.5) 5(-2.15,10.5) 6(-3.25,10.5) 7(-4.35,10.5) 8(-5.45,10.5) 9(-6.55,10.5)
  rect 1.194x1.422 smd: 10(-7.7,10)
  rect 1.194x2.21 smd: 11(-7.75,0.4) 12(7.75,0.4)
  rect 1.6x1.422 smd: 13(6.9,10)
SO8
  rect 0.635x1.778 smd: 1(-1.905,-2.594) 2(-0.635,-2.594) 3(0.635,-2.594) 4(1.905,-2.594) 5(1.905,2.594) 6(0.635,2.594) 7(-0.635,2.594) 8(-1.905,2.594)
SOIC8
  rect 0.635x1.778 smd: 1(-1.905,-2.594) 2(-0.635,-2.594) 3(0.635,-2.594) 4(1.905,-2.594) 5(1.905,2.594) 6(0.635,2.594) 7(-0.635,2.594) 8(-1.905,2.594)
SOT23-6
  rect 0.635x1.27 smd: 1(-0.95,-1.25) 2(0,-1.25) 3(0.95,-1.25) 4(0.95,1.25) 5(0,1.25) 6(-0.95,1.25)
TFM48-40-480
  rect 0.635x1.727 smd: 1(-11.684,-7.08) 2(-10.668,-7.08) 3(-9.652,-7.08) 4(-8.636,-7.08) 5(-7.62,-7.08) 6(-6.604,-7.08) 7(-5.588,-7.08) 8(-4.572,-7.08) 9(-3.556,-7.08) 10(-2.54,-7.08) 11(-1.524,-7.08) 12(-0.508,-7.08) 13(0.508,-7.08) 14(1.524,-7.08) 15(2.54,-7.08) 16(3.556,-7.08) 17(4.572,-7.08) 18(5.588,-7.08) 19(6.604,-7.08) 20(7.62,-7.08) 21(8.636,-7.08) 22(9.652,-7.08) 23(10.668,-7.08) 24(11.684,-7.08) 25(11.684,7.08) 26(10.668,7.08) 27(9.652,7.08) 28(8.636,7.08) 29(7.62,7.08) 30(6.604,7.08) 31(5.588,7.08) 32(4.572,7.08) 33(3.556,7.08) 34(2.54,7.08) 35(1.524,7.08) 36(0.508,7.08) 37(-0.508,7.08) 38(-1.524,7.08) 39(-2.54,7.08) 40(-3.556,7.08) 41(-4.572,7.08) 42(-5.588,7.08) 43(-6.604,7.08) 44(-7.62,7.08) 45(-8.636,7.08) 46(-9.652,7.08) 47(-10.668,7.08) 48(-11.684,7.08)
TPAD
  round 1.016 smd: 1(0,0)
TSOP-II-54
  rect 0.406x1.651 smd: 1(-10.4,-5.63) 2(-9.6,-5.63) 3(-8.8,-5.63) 4(-8,-5.63) 5(-7.2,-5.63) 6(-6.4,-5.63) 7(-5.6,-5.63) 8(-4.8,-5.63) 9(-4,-5.63) 10(-3.2,-5.63) 11(-2.4,-5.63) 12(-1.6,-5.63) 13(-0.8,-5.63) 14(0,-5.63) 15(0.8,-5.63) 16(1.6,-5.63) 17(2.4,-5.63) 18(3.2,-5.63) 19(4,-5.63) 20(4.8,-5.63) 21(5.6,-5.63) 22(6.4,-5.63) 23(7.2,-5.63) 24(8,-5.63) 25(8.8,-5.63) 26(9.6,-5.63) 27(10.4,-5.63) 28(10.4,5.63) 29(9.6,5.63) 30(8.8,5.63) 31(8,5.63) 32(7.2,5.63) 33(6.4,5.63) 34(5.6,5.63) 35(4.8,5.63) 36(4,5.63) 37(3.2,5.63) 38(2.4,5.63) 39(1.6,5.63) 40(0.8,5.63) 41(0,5.63) 42(-0.8,5.63) 43(-1.6,5.63) 44(-2.4,5.63) 45(-3.2,5.63) 46(-4,5.63) 47(-4.8,5.63) 48(-5.6,5.63) 49(-6.4,5.63) 50(-7.2,5.63) 51(-8,5.63) 52(-8.8,5.63) 53(-9.6,5.63) 54(-10.4,5.63)
TSOT-23-5
  rect 0.635x1.27 smd: 1(-0.95,-1.25) 2(0,-1.25) 3(0.95,-1.25) 4(0.95,1.25) 5(-0.95,1.25)
TSSOP-20
  rect 0.356x1.524 smd: 1(-2.925,-3) 2(-2.275,-3) 3(-1.625,-3) 4(-0.975,-3) 5(-0.325,-3) 6(0.325,-3) 7(0.975,-3) 8(1.625,-3) 9(2.275,-3) 10(2.925,-3) 11(2.925,3) 12(2.275,3) 13(1.625,3) 14(0.975,3) 15(0.325,3) 16(-0.325,3) 17(-0.975,3) 18(-1.625,3) 19(-2.275,3) 20(-2.925,3)
unnamed#2
  round 1.016 smd: (-10,-1.5) (-10,-1.5)
  round 2.032 hole 2.032 unplated: (-5,-2.5)
unnamed#3
  round 1.016 smd: (-15,1.5) (-15,1.5)
  round 2.032 hole 2.032 unplated: (-5,2.5)
unnamed#4
  round 0.813 hole 0.813 unplated: (-2.5,1.18) (-2.5,-1.18) (-1.25,1.18) (-1.25,-1.18) (0,1.18) (0,-1.18) (1.25,1.18) (1.25,-1.18) (2.5,1.18) (2.5,-1.18)
unnamed#5
  round 2.032 hole 2.032 unplated: (5,2.5)
  round 1.016 smd: (10,1.5) (10,1.5)
unnamed#6
  round 0.813 hole 0.813 unplated: (-2.5,1.18) (-1.25,1.18) (0,1.18) (1.25,1.18) (2.5,1.18)
unnamed#7
  round 1.016 smd: 1(0,0)

## Nets
A2V5: C243.1 C256.1 C257.1 C276.1 C277.1 J1.4 P1.F5 P1.F12 P1.L5 P1.L12 R12.2 R164.2 U6.5 U25.5
D1V2: C239.1 C240.1 C258.1 C259.1 C260.1 C261.1 L8.2 P1.D4 P1.D13 P1.F7 P1.F11 P1.G6 P1.G7 P1.G8 P1.G9 P1.G10 P1.H6 P1.H11 P1.J6 P1.K7 P1.K11 P1.N4 P1.N13 U24.5
D3V3: C5.1 C6.1 C7.1 C8.1 C9.1 C10.1 C28.2 C29.1 C30.1 C31.1 C32.1 C33.1 C34.1 C35.1 C36.1 C37.1 C38.1 C238.1 C241.1 C244.2 C245.2 C246.2 C247.2 C248.2 C253.2 C254.1 C255.1 C262.1 C263.1 C264.1 C265.1 C266.1 C267.1 C268.1 C269.1 C270.1 C271.1 C274.1 C275.1 C282.1 C283.1 C284.1 C285.1 C286.1 C287.1 C288.1 C289.1 D1.1 D2.1 D38.1 J3.4 J4.4 J6.2 L1.2 L10.2 P1.A1 P1.A16 P1.C4 P1.C7 P1.C10 P1.C13 P1.E3 P1.E14 P1.G3 P1.G14 P1.K3 P1.K14 P1.M3 P1.M14 P1.P4 P1.P7 P1.P10 P1.P13 P1.T1 P1.T16 R4.1 R5.1 R16.2 R17.2 R18.2 R94.1 R129.1 R137.1 R138.1 R139.1 R140.1 R141.1 R142.2 U5.1 U5.3 U5.9 U5.14 U5.27 U5.43 U5.49 U7.3 U7.7 U7.8 U24.1 U24.4 U25.1 U25.3 U26.6 U26.11 U26.28 U26.50 U26.75 U26.100 U27.1 U27.20 U28.1 U28.20 U29.1 U29.20 U30.1 U30.20 U31.1 U31.20 U32.1 U32.20 U33.1 U33.20 U34.1 U34.20 X4.1 X4.4
GND: C1.2 C2.2 C5.2 C6.2 C7.2 C8.2 C9.2 C10.2 C11.1 C28.1 C29.2 C30.2 C31.2 C32.2 C33.2 C34.2 C35.2 C36.2 C37.2 C38.2 C39.1 C40.1 C41.1 C42.1 C43.2 C44.2 C45.2 C46.2 C47.2 C48.2 C49.2 C50.2 C51.2 C52.2 C53.2 C54.2 C55.2 C56.2 C57.2 C58.2 C59.2 C60.2 C226.1 C227.1 C228.1 C229.1 C230.1 C231.1 C232.1 C233.1 C238.2 C239.2 C240.2 C241.2 C242.2 C243.2 C244.1 C245.1 C246.1 C247.1 C248.1 C251.1 C252.1 C253.1 C254.2 C255.2 C256.2 C257.2 C258.2 C259.2 C260.2 C261.2 C262.2 C263.2 C264.2 C265.2 C266.2 C267.2 C268.2 C269.2 C270.2 C271.2 C274.2 C275.2 C276.2 C277.2 C278.2 C279.2 C280.2 C281.2 C282.2 C283.2 C284.2 C285.2 C286.2 C287.2 C288.2 C289.2 D4.1 D26.2 J1.2 J1.10 J3.1 J4.6 J6.3 J7.3 J8.4 J8.8 J8.16 J11.4 J11.8 J11.16 J12.4 J12.8 J12.16 J13.4 J13.8 J13.16 J15.3 J15.4 P1.B2 P1.B15 P1.C5 P1.C12 P1.D7 P1.D10 P1.E2 P1.E4 P1.E5 P1.E12 P1.E13 P1.F6 P1.F10 P1.G4 P1.G12 P1.G13 P1.H7 P1.H8 P1.H9 P1.H10 P1.H13 P1.H15 P1.H16 P1.J3 P1.J7 P1.J8 P1.J9 P1.J10 P1.J11 P1.K4 P1.K8 P1.K13 P1.M4 P1.M5 P1.M12 P1.M13 P1.N7 P1.N10 P1.P5 P1.P12 P1.R2 P1.R15 R2.2 R3.1 R11.1 R31.2 R33.2 R73.1 R76.1 R77.1 R89.1 R90.1 R92.1 R95.1 R97.1 R99.1 R101.1 R105.1 R106.1 R107.1 R108.1 R130.2 R131.1 R135.1 R154.2 R155.2 R156.2 R157.2 U1.4 U5.6 U5.12 U5.28 U5.41 U5.46 U5.52 U5.54 U6.2 U7.4 U8.41 U9.41 U24.2 U25.2 U26.10 U26.19 U26.20 U26.27 U26.49 U26.74 U26.99 U27.10 U27.19 U28.10 U28.19 U29.10 U29.19 U30.10 U30.19 U31.10 U31.19 U32.10 U32.19 U33.10 U33.19 U34.10 U34.19 X4.2 Y1.2 Y1.4 Y2.2 Y2.4
GND_EARTH: C236.1 C278.1 C292.1 H1.1 J2.19 J2.20 R154.1
VCC_5V: C1.1 D4.2 J6.1 J15.1 J15.2 R1.2 U1.2
VDDIO_A_RGMII: C44.1 R91.1 R96.1 R103.1 R120.1 U8.27
VDDIO_B_RGMII: C46.1 R93.1 R98.1 R104.1 R122.1 U9.27
AB16: P1.A10 U26.58
AB17: P1.B11 U26.59
AB18: P1.A11 U26.60
AB19: P1.F3 U26.2
ARM_CLK: P1.D3 U26.12
AS_DAT0: P1.H2 R13.1
ASDO: P1.C1 U7.5
CAN_RX: J6.5 U26.70
CAN_TX: J6.4 U26.71
CLK_25M: P1.E1 X4.3
CONF_DONE: P1.H14 R18.1
DB0: P1.B12 U26.61
DB1: P1.A12 U26.62
DB2: P1.B7 U26.81
DB3: P1.A6 U26.82
DB4: P1.B1 U26.38
DB5: P1.A2 U26.39
DB6: P1.B3 U26.40
DB7: P1.A3 U26.41
DB8: P1.B4 U26.42
DB9: P1.A4 U26.43
DB10: P1.B5 U26.44
DB11: P1.A5 U26.45
DB12: P1.B6 U26.46
DB13: P1.A7 U26.55
DB14: P1.C8 U26.56
DB15: P1.B10 U26.57
DCLK: P1.H1 U7.6
ENET_AVDD_3.3: C59.1 C60.1 FB3.2 U8.14 U9.14
ENET_DVDD_3.3: C57.1 C58.1 FB3.1 R94.2 R146.1 R147.1 R148.1 R149.1 U8.3 U9.3
ENETA_AVDD_1.1: C47.1 C48.1 C51.1 FB1.2 U8.6 U8.11 U8.17
ENETA_DVDD_1.1: C49.1 C50.1 FB1.1 L6.1 U8.38
ENETA_DVDD_2.5: C43.1 R100.1 R120.2 R123.1 R124.1 R125.1 R126.1 U8.8
ENETA_GTX_CLK: P1.P14 R39.1
ENETA_INTN: P1.K12 R125.2 U8.20
ENETA_LED_1000: R56.1 R76.2 R100.2 U8.22
ENETA_LED_ACT: R51.1 R73.2 R90.2 U8.21
ENETA_MDC: P1.R16 R124.2 U8.40
ENETA_MDI_N0: U8.10 U23.23
ENETA_MDI_N1: U8.13 U23.20
ENETA_MDI_N2: U8.16 U23.17
ENETA_MDI_N3: U8.19 U23.14
ENETA_MDI_P0: U8.9 U23.24
ENETA_MDI_P1: U8.12 U23.21
ENETA_MDI_P2: U8.15 U23.18
ENETA_MDI_P3: U8.18 U23.15
ENETA_MDIO: P1.P15 R123.2 U8.39
ENETA_RESETN: P1.T15 R126.2 U8.1
ENETA_RX_CLK: P1.M15 R121.1
ENETA_RX_D0: P1.L15 R27.1
ENETA_RX_D1: P1.J12 R30.1
ENETA_RX_D2: P1.J14 R35.1
ENETA_RX_D3: P1.J13 R37.1
ENETA_RX_DV: P1.L16 R24.1
ENETA_TX_D0: P1.N14 R43.1
ENETA_TX_D1: P1.N16 R45.1
ENETA_TX_D2: P1.N15 R47.1
ENETA_TX_D3: P1.P16 R49.1
ENETA_TX_EN: P1.L14 R41.1
ENETB_AVDD_1.1: C54.1 C55.1 C56.1 FB2.2 U9.6 U9.11 U9.17
ENETB_DVDD_1.1: C52.1 C53.1 FB2.1 L7.1 U9.38
ENETB_DVDD_2.5: C45.1 R23.1 R26.1 R29.1 R34.1 R102.1 R122.2 U9.8
ENETB_GTX_CLK: P1.F14 R40.1
ENETB_INTN: P1.C11 R29.2 U9.20
ENETB_LED_1000: R60.1 R89.2 R102.2 U9.22
ENETB_LED_ACT: R52.1 R77.2 R92.2 U9.21
ENETB_MDC: P1.K15 R26.2 U9.40
ENETB_MDI_N0: U9.10 U23.11
ENETB_MDI_N1: U9.13 U23.8
ENETB_MDI_N2: U9.16 U23.5
ENETB_MDI_N3: U9.19 U23.2
ENETB_MDI_P0: U9.9 U23.12
ENETB_MDI_P1: U9.12 U23.9
ENETB_MDI_P2: U9.15 U23.6
ENETB_MDI_P3: U9.18 U23.3
ENETB_MDIO: P1.J16 R23.2 U9.39
ENETB_RESETN: P1.K16 R34.2 U9.1
ENETB_RX_CLK: P1.E15 R22.1
ENETB_RX_D0: P1.C15 R28.1
ENETB_RX_D1: P1.B16 R32.1
ENETB_RX_D2: P1.C14 R36.1
ENETB_RX_D3: P1.A15 R38.1
ENETB_RX_DV: P1.C16 R25.1
ENETB_TX_D0: P1.F15 R44.1
ENETB_TX_D1: P1.F16 R46.1
ENETB_TX_D2: P1.G15 R48.1
ENETB_TX_D3: P1.G16 R50.1
ENETB_TX_EN: P1.D16 R42.1
F_CLK: P1.F8 U26.84
F_NAD: P1.C3 U26.93
F_NBL0: P1.E6 U26.97
F_NBL1: P1.C2 U26.98
F_NCE2: P1.D5 U26.88
F_NWAIT: P1.E7 U26.87
GPIO: P1.K6 U26.15
HUB1_A: P1.T6 U28.7 U29.8
HUB1_B: P1.R6 U28.8 U29.6
HUB1_B1: P1.T2 R160.1 U27.5
HUB1_B2: P1.R4 R163.1 U27.2
HUB1_BUF_A: J8.9 U28.13
HUB1_BUF_B: J8.10 U28.12
HUB1_BUF_B1: J8.3 U27.15
HUB1_BUF_B2: J8.7 U27.18
HUB1_BUF_C: J8.11 U28.15
HUB1_BUF_CLK: J8.13 U28.17
HUB1_BUF_D: J8.12 U28.14
HUB1_BUF_G1: J8.2 U27.13
HUB1_BUF_G2: J8.6 U27.16
HUB1_BUF_LATCH: J8.14 U28.16
HUB1_BUF_OE: J8.15 U28.18
HUB1_BUF_R1: J8.1 U27.14
HUB1_BUF_R2: J8.5 U27.17
HUB1_C: P1.T7 U28.5 U29.7
HUB1_CLK: P1.R10 U28.3 U29.5
HUB1_D: P1.R7 U28.6 U29.4
HUB1_G1: P1.P1 R159.1 U27.7
HUB1_G2: P1.R3 R162.1 U27.4
HUB1_LATCH: P1.P9 U28.4 U29.2
HUB1_OE: P1.T10 U28.2 U29.3
HUB1_R1: P1.R1 R158.1 U27.6
HUB1_R2: P1.T3 R161.1 U27.3
HUB2_B1: P1.T12 U30.5
HUB2_B2: P1.R11 U30.7
HUB2_BUF_A: J11.9 U29.12
HUB2_BUF_B: J11.10 U29.14
HUB2_BUF_B1: J11.3 U30.15
HUB2_BUF_B2: J11.7 U30.13
HUB2_BUF_C: J11.11 U29.13
HUB2_BUF_CLK: J11.13 U29.15
HUB2_BUF_D: J11.12 U29.16
HUB2_BUF_G1: J11.2 U30.18
HUB2_BUF_G2: J11.6 U30.17
HUB2_BUF_LATCH: J11.14 U29.18
HUB2_BUF_OE: J11.15 U29.17
HUB2_BUF_R1: J11.1 U30.16
HUB2_BUF_R2: J11.5 U30.14
HUB2_G1: P1.R13 U30.2
HUB2_G2: P1.T13 U30.3
HUB2_R1: P1.R12 U30.4
HUB2_R2: P1.T11 U30.6
HUB3_A: P1.D11 U31.8 U33.2
HUB3_B: P1.E10 U31.7 U33.3
HUB3_B1: P1.L11 U32.4
HUB3_B2: P1.L13 U32.5
HUB3_BUF_A: J13.9 U31.12
HUB3_BUF_B: J13.10 U31.13
HUB3_BUF_B1: J13.3 U32.16
HUB3_BUF_B2: J13.7 U32.15
HUB3_BUF_C: J13.11 U31.14
HUB3_BUF_CLK: J13.13 U31.16
HUB3_BUF_D: J13.12 U31.15
HUB3_BUF_G1: J13.2 U32.13
HUB3_BUF_G2: J13.6 U32.18
HUB3_BUF_LATCH: J13.14 U31.18
HUB3_BUF_OE: J13.15 U31.17
HUB3_BUF_R1: J13.1 U32.14
HUB3_BUF_R2: J13.5 U32.17
HUB3_C: P1.D14 U31.6 U33.4
HUB3_CLK: P1.D12 U31.4 U33.6
HUB3_D: P1.D15 U31.5 U33.5
HUB3_G1: P1.G11 U32.7
HUB3_G2: P1.N11 U32.2
HUB3_LATCH: P1.F13 U31.2 U33.8
HUB3_OE: P1.E11 U31.3 U33.7
HUB3_R1: P1.J15 U32.6
HUB3_R2: P1.M11 U32.3
HUB4_B1: P1.D9 U34.4
HUB4_B2: P1.K9 U34.7
HUB4_BUF_A: J12.9 U33.18
HUB4_BUF_B: J12.10 U33.17
HUB4_BUF_B1: J12.3 U34.16
HUB4_BUF_B2: J12.7 U34.13
HUB4_BUF_C: J12.11 U33.16
HUB4_BUF_CLK: J12.13 U33.14
HUB4_BUF_D: J12.12 U33.15
HUB4_BUF_G1: J12.2 U34.17
HUB4_BUF_G2: J12.6 U34.14
HUB4_BUF_LATCH: J12.14 U33.12
HUB4_BUF_OE: J12.15 U33.13
HUB4_BUF_R1: J12.1 U34.18
HUB4_BUF_R2: J12.5 U34.15
HUB4_G1: P1.F9 U34.3
HUB4_G2: P1.E9 U34.6
HUB4_R1: P1.A14 U34.2
HUB4_R2: P1.C9 U34.5
MIIA_GTX_CLK: R39.2 U8.33
MIIA_RX_CLK: R91.2 R121.2 U8.31
MIIA_RX_D0: R27.2 R95.2 U8.29
MIIA_RX_D1: R30.2 R99.2 U8.28
MIIA_RX_D2: R35.2 R103.2 R105.2 U8.26
MIIA_RX_D3: R37.2 R96.2 U8.25
MIIA_RX_DV: R24.2 R107.2 U8.30
MIIA_TX_D0: R43.2 U8.34
MIIA_TX_D1: R45.2 U8.35
MIIA_TX_D2: R47.2 U8.36
MIIA_TX_D3: R49.2 U8.37
MIIA_TX_EN: R41.2 U8.32
MIIB_GTX_CLK: R40.2 U9.33
MIIB_RX_CLK: R22.2 R93.2 U9.31
MIIB_RX_D0: R28.2 R97.2 U9.29
MIIB_RX_D1: R32.2 R101.2 U9.28
MIIB_RX_D2: R36.2 R104.2 R106.2 U9.26
MIIB_RX_D3: R38.2 R98.2 U9.25
MIIB_RX_DV: R25.2 R108.2 U9.30
MIIB_TX_D0: R44.2 U9.34
MIIB_TX_D1: R46.2 U9.35
MIIB_TX_D2: R48.2 U9.36
MIIB_TX_D3: R50.2 U9.37
MIIB_TX_EN: R42.2 U9.32
NCONFIG: P1.H5 R17.1
NCSO: P1.D2 U7.1
NRST: C11.2 R5.2 U26.14
NSTATUS: P1.F4 R16.1
P0MDIA+: J2.1 U23.25
P0MDIA-: J2.2 U23.26
P0MDIB+: J2.3 U23.28
P0MDIB-: J2.6 U23.29
P0MDIC+: J2.4 U23.31
P0MDIC-: J2.5 U23.32
P0MDID+: J2.7 U23.34
P0MDID-: J2.8 U23.35
P1MDIA+: J2.9 U23.37
P1MDIA-: J2.10 U23.38
P1MDIB+: J2.11 U23.40
P1MDIB-: J2.14 U23.41
P1MDIC+: J2.12 U23.43
P1MDIC-: J2.13 U23.44
P1MDID+: J2.15 U23.46
P1MDID-: J2.16 U23.47
PHYA-GREEN: D37.2 R56.2
PHYA-YELLOW: D36.2 R51.2
PHYB-GREEN: D35.2 R60.2
PHYB-YELLOW: D34.2 R52.2
RD: P1.D6 U26.85
RS485_DE: J6.8 U26.52
RS485_RE: J6.7 U26.51
RS485_RX: J6.6 U26.48
RS485_TX: J6.9 U26.47
SD_A0: P1.F1 U5.23
SD_A1: P1.G2 U5.24
SD_A2: P1.J1 U5.25
SD_A3: P1.G1 U5.26
SD_A4: P1.N5 U5.29
SD_A5: P1.T5 U5.30
SD_A6: P1.R5 U5.31
SD_A7: P1.N6 U5.32
SD_A8: P1.P6 U5.33
SD_A9: P1.M7 U5.34
SD_A10: P1.J2 U5.22
SD_A11: P1.P8 U5.35
SD_BA0: P1.K2 U5.20
SD_BA1: P1.K1 U5.21
SD_CAS: P1.F2 U5.17
SD_CKE: P1.M6 U5.37
SD_CLK: P1.T4 U5.38
SD_CS: P1.L1 U5.19
SD_D0: P1.P3 U5.2
SD_D1: P1.N3 U5.4
SD_D2: P1.P2 U5.5
SD_D3: P1.L6 U5.7
SD_D4: P1.N2 U5.8
SD_D5: P1.L4 U5.10
SD_D6: P1.L3 U5.11
SD_D7: P1.N1 U5.13
SD_D8: P1.M8 U5.42
SD_D9: P1.L8 U5.44
SD_D10: P1.L9 U5.45
SD_D11: P1.N9 U5.47
SD_D12: P1.M9 U5.48
SD_D13: P1.L10 U5.50
SD_D14: P1.P11 U5.51
SD_D15: P1.T14 U5.53
SD_DQ0: P1.L2 U5.15
SD_DQ1: P1.N8 U5.39
SD_RAS: P1.K5 U5.18
SD_WE: P1.D1 U5.16
SWCLK: J3.2 R129.2 U26.76
SWDIO: J3.3 R130.1 U26.72
TCK: J1.1 P1.H3 R11.2 U6.1
TDI: J1.9 P1.H4 U6.3
TDO: J1.3 P1.J4 U6.6
TF_CLK: J4.5 R163.2 U26.80
TF_CMD: J4.3 R139.2 R162.2 U26.83
TF_DATA0: J4.7 R138.2 R158.2 U26.65
TF_DATA1: J4.8 R137.2 R159.2 U26.66
TF_DATA2: J4.1 R141.2 R160.2 U26.78
TF_DATA3: J4.2 R140.2 R161.2 U26.79
TMS: J1.5 P1.J5 R12.1 U6.4
USART_RX: J7.2 U26.26
USART_TO_FPGA_RX: P1.A13 U26.69
USART_TO_FPGA_TX: P1.B13 U26.68
USART_TX: J7.1 U26.25
WR: P1.C6 U26.86
N00507: R1.1 U1.7
N00656: C2.1 U1.8
N00761: C3.2 R2.1
N00851: C3.1 U1.6
N00855: C4.1 L1.1 U1.3
N00885: C4.2 U1.1
N00957: R3.2 R4.2 U1.5
N59239: L6.2 U8.2
N59407: C41.2 U8.5 Y1.3
N59411: C39.2 U8.4 Y1.1
N59605: L7.2 U9.2
N59753: C42.2 U9.5 Y2.3
N59757: C40.2 U9.4 Y2.1
N68560: C226.2 U23.1
N68564: R111.1 U23.48
N68628: C227.2 U23.4
N68632: R112.1 U23.45
N68696: C228.2 U23.7
N68700: R113.1 U23.42
N68748: C229.2 U23.10
N68752: R114.1 U23.39
N68848: C230.2 U23.13
N68852: R115.1 U23.36
N68966: C231.2 U23.16
N68970: R116.1 U23.33
N69086: C232.2 U23.19
N69090: R117.1 U23.30
N69194: C233.2 U23.22
N69198: R118.1 U23.27
N70343: P1.H12 R164.1
N5916714: R31.1 U8.7
N5956514: R33.1 U9.7
N15733620: R127.2 U26.16
N15733628: R128.2 U26.17
N15733972: R131.2 U26.94
N15734280: C251.2 C252.2 L10.1 U26.21 U26.22
N15734652: R135.2 U26.37
N15801228: L8.1 U24.3
N15801432: C242.1 U25.4
N15813450: D26.1 R142.1
N15817579: R13.2 U7.2
N15925802: D37.1 R146.2
N15925882: D36.1 R147.2
N15925976: D35.1 R148.2
N15926055: D34.1 R149.2
N15962568: C279.1 H2.1 R155.1
N15964024: C280.1 H3.1 R156.1
N15964116: C281.1 H4.1 R157.1
N15994943: C292.2 R111.2 R112.2 R113.2 R114.2
N15995237: C236.2 R115.2 R116.2 R117.2 R118.2
N16105743: P1.E8 R165.1
N16105815: D38.2 R165.2
N157335061: D1.2 R128.1
N157335281: D2.2 R127.1

Pads without a net: J1 6 7 8; J2 21; J4 9 10 11 12 13; M1 1; M2 1; M3 1; M4 1; NOREF#35 1; NOREF#36 1; P1 A8 A9 B8 B9 B14 D8 E16 G5 K10 L7 M1 M2 M10 M16 N12 R8 R9 R14 T8 T9; U5 36 40; U8 23 24; U9 23 24; U26 1 3 4 5 7 8 9 13 18 23 24 29 30 31 32 33 34 35 36 53 54 63 64 67 73 77 89 90 91 92 95 96; U27 8 9 11 12; U28 9 11; U29 9 11; U30 8 9 11 12; U31 9 11; U32 8 9 11 12; U33 9 11; U34 8 9 11 12

## Via types
v1: diameter 0.559, hole 0.254, TOP to BOTTOM, 534 vias
v2: diameter 0.457, hole 0.203, TOP to BOTTOM, 13 vias
v3: diameter 0, hole 0, ART02 to BOTTOM, 1 via
v4: diameter 0.508, hole 0.254, TOP to BOTTOM, 2 vias

## Routing (per net, layer and track width the routed paths; a pad name or vN(x,y) marks a point on that pad's centre or on a via; arc(x,y) is an arc through that point)
A2V5: length 51.5
  TOP w0.381: P1.L12 80.41,31.16 v1(80.91,30.66) ; P1.F12 v1(79.91,25.66) ; v1(86.91,30.66) 87.41,31.16 P1.L5 ; v1(127.13,24.99) 126.37,24.23 v1(126.37,22.45) 127.13,21.69 127.13,18.94 J1.4 ; P1.F5 v1(87.91,25.66)
  TOP w0.508: v1(106.68,1.62) v1(107.83,1.62) 108.84,2.64 108.84,6.07 113.29,10.51 113.29,11.83 114.13,12.67 119.38,12.67 121.92,10.13 126.24,10.13 127,10.89 127,16.1 125.65,17.45 J1.4
  BOTTOM w0.381: v1(80.91,30.66) 80.41,31.16 P1.L12 ; R12.2 v1(127.13,24.99) ; R164.2 71.12,30.23 70.99,30.1 ; U6.5 v1(126.37,22.45)
D1V2: length 25.6
  TOP w0.381: P1.J6 v1(85.91,29.66) ; P1.K11 81.41,30.16 v1(81.91,29.66) ; P1.K7 v1(85.91,30.66) ; P1.G6 v1(85.91,26.66) P1.G7 ; P1.N13 v1(79.91,33.66) ; P1.G10 v1(81.91,26.66) P1.F11 ; P1.D13 v1(79.91,23.66) ; P1.G8 v1(84.91,26.66) P1.F7 ; P1.H11 v1(80.91,27.66) ; U24.5 59.02,39.29 60.11,38.2 65.31,38.2 65.7,38.58 v1(65.7,39.34) ; P1.D4 v1(88.91,24.66) ; P1.G9 v1(82.91,26.66) ; P1.H6 v1(86.91,27.66) ; P1.N4 v1(88.91,33.66)
  BOTTOM w0.381: v1(85.91,26.66) 85.43,27.15 C260.1 ; C261.1 85.43,29.18 v1(85.91,29.66) ; C258.1 P1.G10 v1(82.91,26.66) ; C259.1 v1(81.91,29.66)
  vias: v1(64.55,40.48) v1(64.55,39.34) v1(65.7,40.48)
D3V3: length 146
  TOP w0.229: v1(103,16.1) 102.87,16.1 102.46,15.69 U26.50 ; U26.75 115.35,14.86 v1(115.7,15.21) ; v1(110.11,30.83) 110.35,30.59 U26.11 ; U26.100 116.31,27.69 v1(115.83,28.16) ; v1(103,26.26) 102.57,26.69 U26.28 ; U26.6 v1(112.85,30.77)
  TOP w0.305: U29.20 70.77,47.57 v1(70.62,47.42) ; U27.1 v1(94.4,44.11) ; U28.1 v1(85.86,44.11) ; U30.1 v1(78.14,44.04) ; U30.20 78.14,47.67 v1(77.98,47.52) ; U29.1 v1(70.77,44.09)
  TOP w0.381: P1.M3 v1(89.91,32.66) ; R5.1 108.84,33.75 v1(108.08,34.51) 108.46,34.89 C28.2 ; J4.4 v1(111.13,43.14) ; U24.1 v1(62.66,42.71) ; v1(121.53,34.65) 121.54,34.64 C34.1 ; R137.1 R138.1 v1(108.21,39.59) ; R140.1 R141.1 108.21,47.59 107.94,47.86 v1(107.94,48.74) ; P1.T1 v1(91.91,36.66) ; P1.C7 v1(85.91,22.66) ; v1(94.11,47.54) 94.4,47.83 U27.20 ; P1.T16 v1(75.91,35.66) ; R129.1 v1(123.32,26.89) ; C29.1 v1(112.15,34.64) ; C286.1 v1(60.84,10.31) ; P1.M14 v1(78.91,31.66) ; U7.7 107.31,35.66 107.57,35.4 C28.2 ; U7.8 107.57,36.93 108.46,36.04 C28.2 ; v1(77.88,30.66) 77.91,30.66 78.41,30.16 P1.K14 ; R4.1 27.69,56.36 29.47,58.14 34.68,58.14 35.06,57.75 v1(35.06,57.12) ; P1.C10 v1(81.91,22.66) ; P1.C4 v1(88.91,22.66) ; v1(97.41,25.5) 97.92,24.99 C274.1 98.64,25.33 X4.4 X4.1 ; P1.E3 v1(89.91,24.66) ; C288.1 81.33,10.36 v1(81.41,10.28) ; P1.A1 v1(90.91,20.66) ; v1(85.6,47.54) 85.86,47.8 U28.20 ; C32.1 119.89,34.64 v1(119.93,34.68) ; R142.2 31.37,56.61 ; C30.1 115.67,34.67 v1(115.64,34.7) ; C289.1 v1(88.9,10.28) ; D1.1 v1(114.43,6.57) ; v1(69.22,7.72) 69.35,7.84 C287.1 ; P1.P10 82.41,34.16 v1(81.91,34.66) ; U7.3 v1(99.32,34.39) ; P1.A16 v1(75.91,20.66) ; P1.P13 79.41,34.16 v1(78.91,34.66) ; R139.1 v1(107.83,44.17) ; P1.K3 v1(89.91,30.66) ; D38.1 v1(98.42,11.56) ; P1.G3 v1(89.91,26.66) ; P1.C13 v1(78.91,22.66) ; P1.P4 v1(88.91,34.66) ; P1.G14 v1(77.91,26.66) ; D2.1 v1(116.08,6.57) ; P1.E14 v1(77.91,24.66) ; P1.P7 v1(85.91,34.66)
  BOTTOM w0.254: v1(80.9,37.56) 81.67,36.8 81.67,35.28 81.91,35.03 v1(81.91,34.66)
  BOTTOM w0.305: U34.20 81.63,10.07 v1(81.41,10.28) ; v1(88.9,10.28) 89.12,10.07 U33.20 ; U33.1 v1(89.12,13.79) ; 61.09,15.03 v1(61.09,13.69) ; v1(69.22,7.72) 69.21,7.73 U31.20 ; v1(60.84,10.31) 61.09,10.06 61.09,9.03 ; U34.1 v1(81.63,13.79) ; U31.1 v1(69.21,13.69) ; 68.46,29.81 68.84,29.81 69.09,30.07 69.09,31.21 68.82,31.48 U25.3
  BOTTOM w0.381: C254.1 75.95,20.62 v1(75.91,20.66) ; C38.1 v1(83.06,17.5) ; C263.1 88.9,34.67 v1(88.91,34.66) ; C244.2 v1(103,16.1) ; v1(112.85,30.77) 113.03,30.59 C253.2 ; U5.49 117.53,49.48 C35.1 117.51,50.36 v1(117.48,50.39) ; C10.1 33.37,55.56 ; v1(80.9,37.56) 81.03,37.69 C266.1 ; v1(115.64,34.7) 115.13,35.21 U5.9 ; v1(77.91,24.66) 77.85,24.61 C269.1 ; U5.14 111.13,35.15 111.64,34.64 v1(112.15,34.64) ; C7.1 35.15,55.76 v1(35.06,55.85) ; R17.2 90.58,26.66 v1(89.91,26.66) 89.76,26.81 R16.2 ; U5.3 v1(119.93,34.68) ; C285.1 70.71,47.51 v1(70.62,47.42) ; v1(103,26.26) 102.75,26 C248.2 ; C282.1 93.98,47.42 v1(94.11,47.54) ; C267.1 89.98,24.73 v1(89.91,24.66) ; v1(81.91,22.66) 81.91,21.95 C265.1 ; C268.1 90.77,20.8 v1(90.91,20.66) ; v1(99.32,34.39) 99.45,34.26 C31.1 100.73,34.91 U5.27 ; v1(78.91,34.66) 78.87,34.7 C271.1 ; R18.2 66.17,25.97 v1(66.19,25.99) ; v1(115.7,15.21) 115.83,15.08 C247.2 ; C9.1 34.26,55.56 ; U5.43 112.73,49.2 C33.1 v1(113.54,49.25) ; v1(38.52,46.71) R94.1 v1(37.5,45.69) ; C283.1 85.57,47.57 v1(85.6,47.54) ; C255.1 91.83,36.75 v1(91.91,36.66) ; L10.2 v1(111.04,32.39) ; C270.1 77.87,30.68 v1(77.88,30.66) ; C262.1 75.82,35.75 v1(75.91,35.66) ; C8.1 36.04,55.56 v1(36.33,55.85) ; U5.1 v1(121.53,34.65) ; C36.1 v1(111.51,27.66) ; C246.2 v1(110.11,30.83) ; C264.1 78.87,22.62 v1(78.91,22.66) ; C275.1 v1(97.41,25.5) ; C37.1 v1(107.07,16.23) ; C245.2 v1(115.83,28.16) ; C284.1 v1(77.98,47.52)
  vias: v1(33.79,57.12) v1(33.79,55.85) v1(36.33,57.12) v1(37.6,57.12) v1(37.6,55.85) v1(55.41,45.69) v1(55.41,44.55) v1(56.42,45.69) v1(57.44,45.69) v1(64.27,30.07) v1(65.16,30.07)
GND: length 276.6
  TOP w0.229: U26.49 100.29,16.19 v1(100.21,16.1) ; U26.20 105.85,30.76 v1(105.92,30.83) ; U26.19 106.35,30.37 106.81,30.83 v1(107.07,30.83) ; U26.10 110.85,30.68 v1(111,30.83) ; U26.27 103,27.19 v1(103.13,27.06) ; U26.99 v1(115.85,27.19) ; U26.74 v1(114.85,15.21)
  TOP w0.305: C41.1 43.34,44.17 v1(43.34,45.69) 43.34,46.71 43.56,46.92 Y1.2 44.53,47.85 44.78,48.1 v1(45.88,48.1) 47.66,48.1 47.86,47.9 47.86,45.51 47.57,45.22 Y1.4 46.73,44.55 47.15,44.12 C39.1 47.15,43.53 v1(47.79,42.9) ; U30.10 v1(83.99,44.11) ; v1(71.63,47.42) 71.42,47.63 U29.19 ; U30.19 78.79,47.73 v1(79,47.52) ; U27.10 v1(100.25,44.11) ; U29.10 76.62,44 v1(76.46,44.17) ; U28.10 v1(91.71,44.11)
  TOP w0.381: C28.1 109.48,35.28 v1(110.11,34.64) ; P1.N10 82.41,33.16 v1(81.91,33.66) ; P1.J8 v1(84.91,29.66) P1.J7 ; P1.G13 v1(78.91,26.66) ; P1.R15 77.41,35.16 v1(76.91,35.66) ; C288.2 82.35,10.36 v1(82.43,10.28) ; C50.2 v1(54.14,45.31) ; R106.1 v1(47.41,15.21) ; v1(61.98,10.31) 61.85,10.43 C286.2 ; P1.E13 v1(78.91,24.66) ; X4.2 95.88,27.78 v1(95.13,27.78) ; R130.2 v1(123.32,32.61) ; U27.19 v1(95.05,47.49) ; v1(78.91,32.66) 79.41,32.16 P1.M13 ; P1.J10 v1(82.91,29.66) 83.41,29.16 P1.J9 ; P1.M4 v1(88.91,32.66) ; v1(29.6,52.93) 29.47,53.06 D26.2 ; P1.D7 v1(85.91,23.66) ; P1.E2 90.41,25.16 v1(89.91,25.66) ; P1.H15 P1.H16 75.82,28.16 v1(75.7,28.04) ; R101.1 v1(53.5,14.83) ; C29.2 v1(112.15,31.72) ; P1.F6 v1(85.91,25.66) ; C11.1 v1(109.86,33.88) ; C30.2 v1(114.65,32.74) ; P1.H9 v1(82.91,27.66) ; P1.J11 81.41,29.16 v1(80.91,29.66) ; R131.1 118.24,28.04 v1(117.99,28.29) ; v1(79.91,32.66) 80.41,32.16 P1.M12 ; R108.1 v1(53.63,17.24) ; C32.2 v1(120.65,32.74) ; R3.1 v1(23.12,55.09) ; P1.H8 v1(84.91,27.66) ; C53.2 v1(55.15,27.4) ; P1.E12 v1(79.91,24.66) ; v1(99.32,33.25) 99.45,33.12 U7.4 ; P1.B15 v1(77.91,21.66) ; C41.1 43.85,43.3 v1(44.23,42.92) ; R2.2 21.04,49.99 v1(21.54,49.99) ; P1.C12 v1(79.91,22.66) ; R89.1 v1(41.01,15.97) ; P1.K13 79.41,30.16 v1(78.91,30.66) ; P1.F10 v1(81.91,25.66) ; v1(40.96,45.05) 41.34,44.67 R31.2 ; P1.E5 v1(87.91,24.66) P1.E4 ; R97.1 v1(56.81,14.19) ; R33.2 v1(43.09,28.42) ; P1.B2 v1(89.91,22.66) ; P1.P12 80.41,34.16 v1(79.91,34.66) ; C2.2 v1(18.77,47.5) ; P1.P5 v1(87.91,34.66) ; R90.1 42.2,32.86 v1(42.2,32.18) ; U28.19 v1(86.51,47.56) ; R135.1 v1(97.03,22.32) ; C289.2 v1(89.92,10.28) ; P1.H13 v1(79.91,27.66) P1.G12 ; P1.H10 v1(81.91,27.66) ; P1.J3 v1(88.91,29.66) ; P1.K4 v1(88.91,30.66) ; J4.6 v1(111.21,40.94) ; P1.R2 v1(90.91,35.66) ; C40.1 48.04,25.88 47.62,26.3 Y2.4 48.55,27.19 48.8,27.44 v1(48.8,28.04) 48.8,29.61 48.47,29.94 v1(46.65,29.94) 45.76,29.94 45.42,29.6 Y2.2 44.57,28.89 44.23,28.54 v1(44.23,28.04) 44.23,26.31 43.93,26 v1(43.93,25.62) C42.1 ; C52.2 v1(56.17,26) ; P1.H7 v1(85.91,27.66) ; R99.1 v1(50.84,30.45) ; R92.1 v1(38.34,14.83) ; P1.C5 v1(87.91,22.66) ; R73.1 43.7,32.76 v1(43.7,32.18) ; P1.K8 v1(84.91,30.66) ; v1(43.85,29.18) 44.11,29.43 R76.1 ; P1.D10 v1(81.91,23.66) ; R107.1 v1(50.96,33.12) ; C287.2 70.36,7.97 v1(70.11,7.72) ; R105.1 v1(47.41,32.74) ; P1.M5 v1(87.91,32.66) ; C49.2 v1(55.15,43.66) ; P1.G4 v1(87.91,26.66) ; R77.1 v1(38.34,15.97) ; C34.2 v1(122.31,32.74) ; R95.1 v1(56.17,30.45) ; P1.N7 v1(85.91,33.66) ; v1(95.89,25.5) 95.89,25.12 C274.2
  ART02 w0.381: 125.65,20.43 J1.2 126.62,19.46 ; 125.65,10.5 J1.10 126.62,11.46 ; 11.05,57.23 J15.3 10.08,58.2 ; 86.53,5.77 J12.4 ; J12.4 87.65,4.65 ; J12.4 87.65,6.89 ; J12.4 88.77,5.77 ; J6.3 13.49,1.75 13.08,2.16 ; J6.3 14,2.89 ; J6.3 14.94,1.75 ; J13.8 53.85,5.77 ; J13.8 52.73,6.89 ; J13.8 52.73,4.65 ; J13.8 51.61,5.77 ; 99.23,54.23 J8.4 ; J8.4 101.47,54.23 ; J8.4 100.35,53.11 ; J8.4 100.35,55.35 ; 102.89,4.65 J12.16 ; J12.16 101.77,5.77 ; J12.16 102.89,6.89 ; J12.16 104.01,5.77 ; 124.83,27.02 J3.1 ; J3.1 125.8,26.05 ; J3.1 126.77,27.02 ; J11.4 60.35,55.35 ; J11.4 59.23,54.23 ; J11.4 60.35,53.11 ; J11.4 61.47,54.23 ; J8.16 85.11,55.35 ; J8.16 83.99,54.23 ; J8.16 85.11,53.11 ; J8.16 86.23,54.23 ; J13.16 64.01,5.77 ; J13.16 62.89,4.65 ; J13.16 61.77,5.77 ; J13.16 62.89,6.89 ; J12.8 92.73,6.89 ; J12.8 91.61,5.77 ; J12.8 93.85,5.77 ; J12.8 92.73,4.65 ; 54.15,54.23 J11.8 ; J11.8 55.27,53.11 ; J11.8 55.27,55.35 ; J11.8 56.39,54.23 ; J11.16 46.23,54.23 ; J11.16 45.11,55.35 ; J11.16 43.99,54.23 ; J11.16 45.11,53.11 ; J13.4 47.65,6.89 ; J13.4 48.77,5.77 ; J13.4 47.65,4.65 ; J13.4 46.53,5.77 ; 94.15,54.23 J8.8 ; J8.8 95.27,55.35 ; J8.8 95.27,53.11 ; J8.8 96.39,54.23 ; 8.08,58.2 J15.4 ; J15.4 9.05,57.23 ; J15.4 10.02,58.2 ; 115.45,2.83 J7.3 116.46,1.81
  BOTTOM w0.305: U31.19 69.86,7.97 v1(70.11,7.72) ; v1(82.43,10.28) 82.28,10.13 U34.19 ; U33.19 89.77,10.13 v1(89.92,10.28) ; U31.10 v1(75.06,16.48) ; U34.10 v1(87.48,13.79) ; U32.19 61.74,10.06 v1(61.98,10.31) ; U33.10 v1(94.97,13.69) ; U32.10 v1(66.94,13.69)
  BOTTOM w0.381: C252.1 105.7,31.05 v1(105.92,30.83) ; v1(45.27,39.24) 44.66,39.85 C48.2 ; C248.1 103.09,27.02 v1(103.13,27.06) ; v1(82.94,20.16) 82.3,20.8 C265.2 ; v1(107.07,30.83) 106.72,31.18 C251.1 ; C227.1 v1(38.09,20.92) ; C260.2 v1(84.91,27.66) ; C43.2 48.17,38.32 v1(47.92,38.07) ; C259.2 83.41,30.16 v1(82.91,29.66) ; C231.1 v1(38.09,33.12) ; v1(92.97,38.32) 92.84,38.2 C255.2 ; C275.2 96.4,24.99 v1(95.89,25.5) ; C9.2 34.26,52.99 ; C271.2 79.89,34.68 v1(79.91,34.66) ; v1(45.25,19.15) 45.1,18.99 C55.2 ; C7.2 35.15,52.99 ; C44.2 47.76,36.51 v1(47.92,36.67) ; C59.2 v1(41.31,40.1) ; C267.2 90,25.75 v1(89.91,25.66) ; v1(47.79,42.9) 47.79,43.28 47.41,43.66 C57.2 ; C268.2 89.91,21.95 v1(89.91,22.66) ; v1(38.09,38.96) 37.83,39.21 C233.1 ; v1(45.25,21.81) 44.74,22.32 C56.2 ; C283.2 86.59,47.64 v1(86.51,47.56) ; C36.2 v1(113.03,27.66) ; C244.1 v1(100.21,16.1) ; v1(79.91,22.66) 79.89,22.64 C264.2 ; C8.2 36.04,52.99 ; v1(47.92,20.54) 48.17,20.8 C45.2 ; C232.1 v1(38.09,36.16) ; C242.2 67.2,32.97 ; C269.2 v1(74.81,24.61) ; v1(115.85,27.19) 115.89,27.15 C245.1 ; v1(112.02,49.75) 112.53,50.26 C33.2 ; v1(121.92,20.29) 121.54,20.67 121.54,22.19 121.8,22.45 U6.2 ; v1(113.24,34.69) 112.73,35.2 U5.12 ; C47.2 46.65,39.97 v1(46.65,39.34) ; C282.2 95,47.44 v1(95.05,47.49) ; v1(114.85,15.21) 114.81,15.17 C247.1 ; C270.2 75.31,30.68 v1(75.29,30.66) ; v1(111,30.83) 111.13,30.7 C246.1 ; C38.2 v1(83.06,19.02) ; C229.1 v1(38.09,27.02) ; C51.2 44.51,36.67 v1(45.25,36.67) ; v1(71.63,47.42) 71.73,47.51 C285.2 ; C46.2 47.76,18.99 v1(47.92,19.15) ; C263.2 88.9,37.31 v1(89.03,37.43) ; v1(76.91,35.66) 76.84,35.73 C262.2 ; v1(115.64,46) 115.13,46.51 U5.46 ; U5.41 111.13,48.61 v1(111,48.74) ; C37.2 v1(108.59,16.23) ; C257.2 86.41,25.16 v1(85.91,25.66) ; C266.2 v1(81.03,40.23) ; C256.2 v1(84.91,30.66) ; U5.28 v1(100.73,46.01) ; U5.52 v1(119.93,48.74) ; R11.1 v1(123.32,26.13) ; v1(46.65,21.81) 46.39,22.07 C54.2 ; v1(81.91,30.66) 81.43,31.15 C277.2 ; U5.6 v1(117.53,37.43) ; C228.1 v1(38.09,23.97) ; v1(99.32,33.25) 100.07,33.25 C31.2 ; v1(81.91,25.66) 81.41,25.16 C276.2 ; C58.2 v1(42.2,46.58) ; v1(41.31,42.39) 40.93,42.01 C60.2 ; C230.1 v1(38.09,30.07) ; C226.1 v1(38.09,17.88) ; P1.J8 v1(84.91,29.66) ; C10.2 33.37,52.99 ; C253.1 v1(114.05,30.7) ; C258.2 83.41,27.16 v1(82.91,27.66) ; C254.2 74.93,19.78 v1(74.17,19.02) ; U5.54 v1(121.53,48.74) ; C35.2 v1(116.5,50.39) ; C284.2 v1(79,47.52)
  vias: v1(8.72,55.37) v1(8.72,54.1) v1(9.66,48.36) v1(9.99,55.37) v1(9.99,54.1) v1(10.29,12.03) v1(10.29,10.76) v1(10.93,52.67) v1(10.93,51.02) v1(10.93,49.63) v1(10.93,48.36) v1(11.26,55.37) v1(11.26,54.1) v1(11.31,12.03) v1(11.31,10.76) v1(12.53,55.37) v1(12.65,54.1) v1(22.48,53.06) v1(23.75,53.06) v1(25.79,52.93) v1(25.79,51.79) v1(27.06,52.93) v1(28.33,52.93) v1(30.74,52.93) v1(38.61,53.18) v1(38.61,51.91) v1(39.88,53.18) v1(39.88,51.91) v1(45.25,38.07) v1(45.25,20.54) v1(46.65,38.07) v1(46.65,36.67) v1(46.65,20.54) v1(46.65,19.15) v1(47.92,39.34) v1(47.92,21.81) v1(55.15,42.64) v1(56.68,42.01) v1(57.69,42.64) v1(58.96,43.66) v1(60.36,43.66) v1(60.74,41.5) v1(60.74,40.23) v1(60.74,39.09) v1(62.01,41.5) v1(64.27,31.97) v1(64.27,28.67) v1(65.16,31.97) v1(65.28,28.67) v1(118.24,55.21) v1(118.24,54.07) v1(118.24,7.21) v1(118.24,5.68) v1(118.26,52.91) v1(119.53,52.91) v1(119.64,7.21) v1(120.91,7.21) v1(122.05,7.21) v1(122.18,53.31) v1(123.58,53.31) v1(123.58,7.21) v1(123.58,5.68)
